# Altium PCB SL-DPT100.PcbDoc (part 1 of 3)
Units mm, origin at the board's own origin, x right, y up, seen from the top; angles counter-clockwise.
Board outline 82 x 97 mm, 4 copper layers (Top Layer, VCC, GND, Bottom Layer); 177 components, 169 nets, 599 pads, 430 vias.
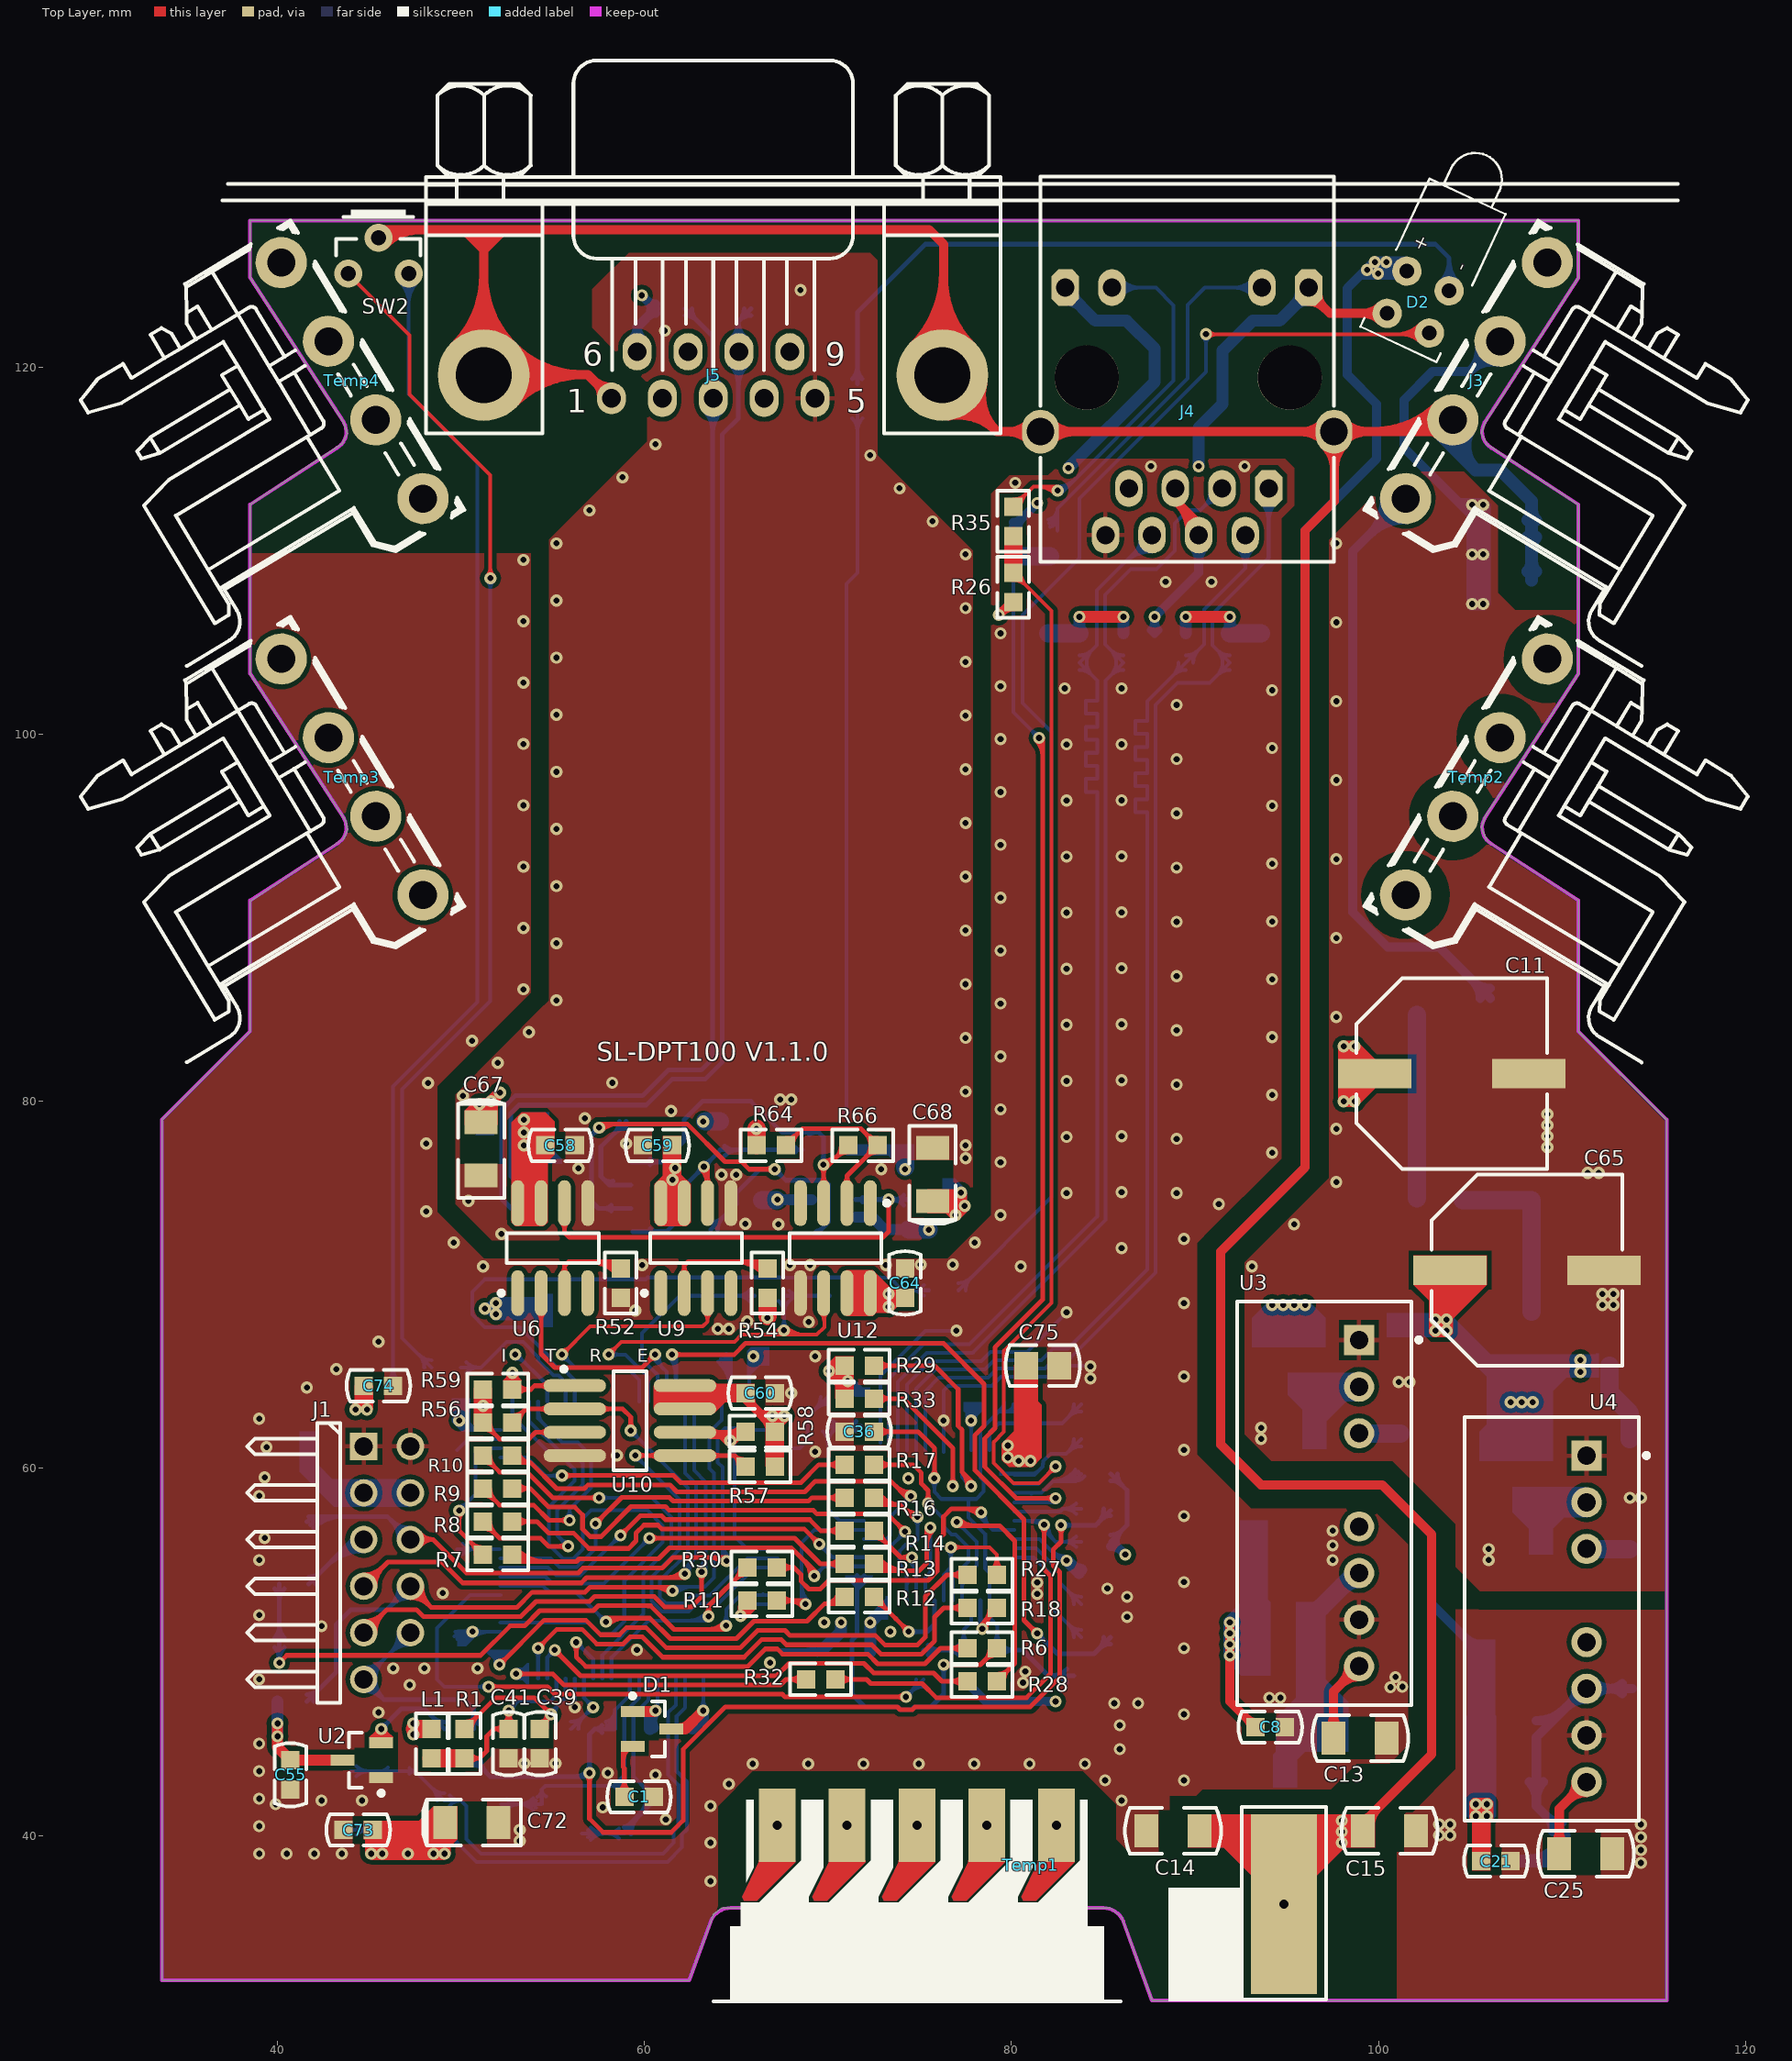
[diagram p0: Top Layer view]
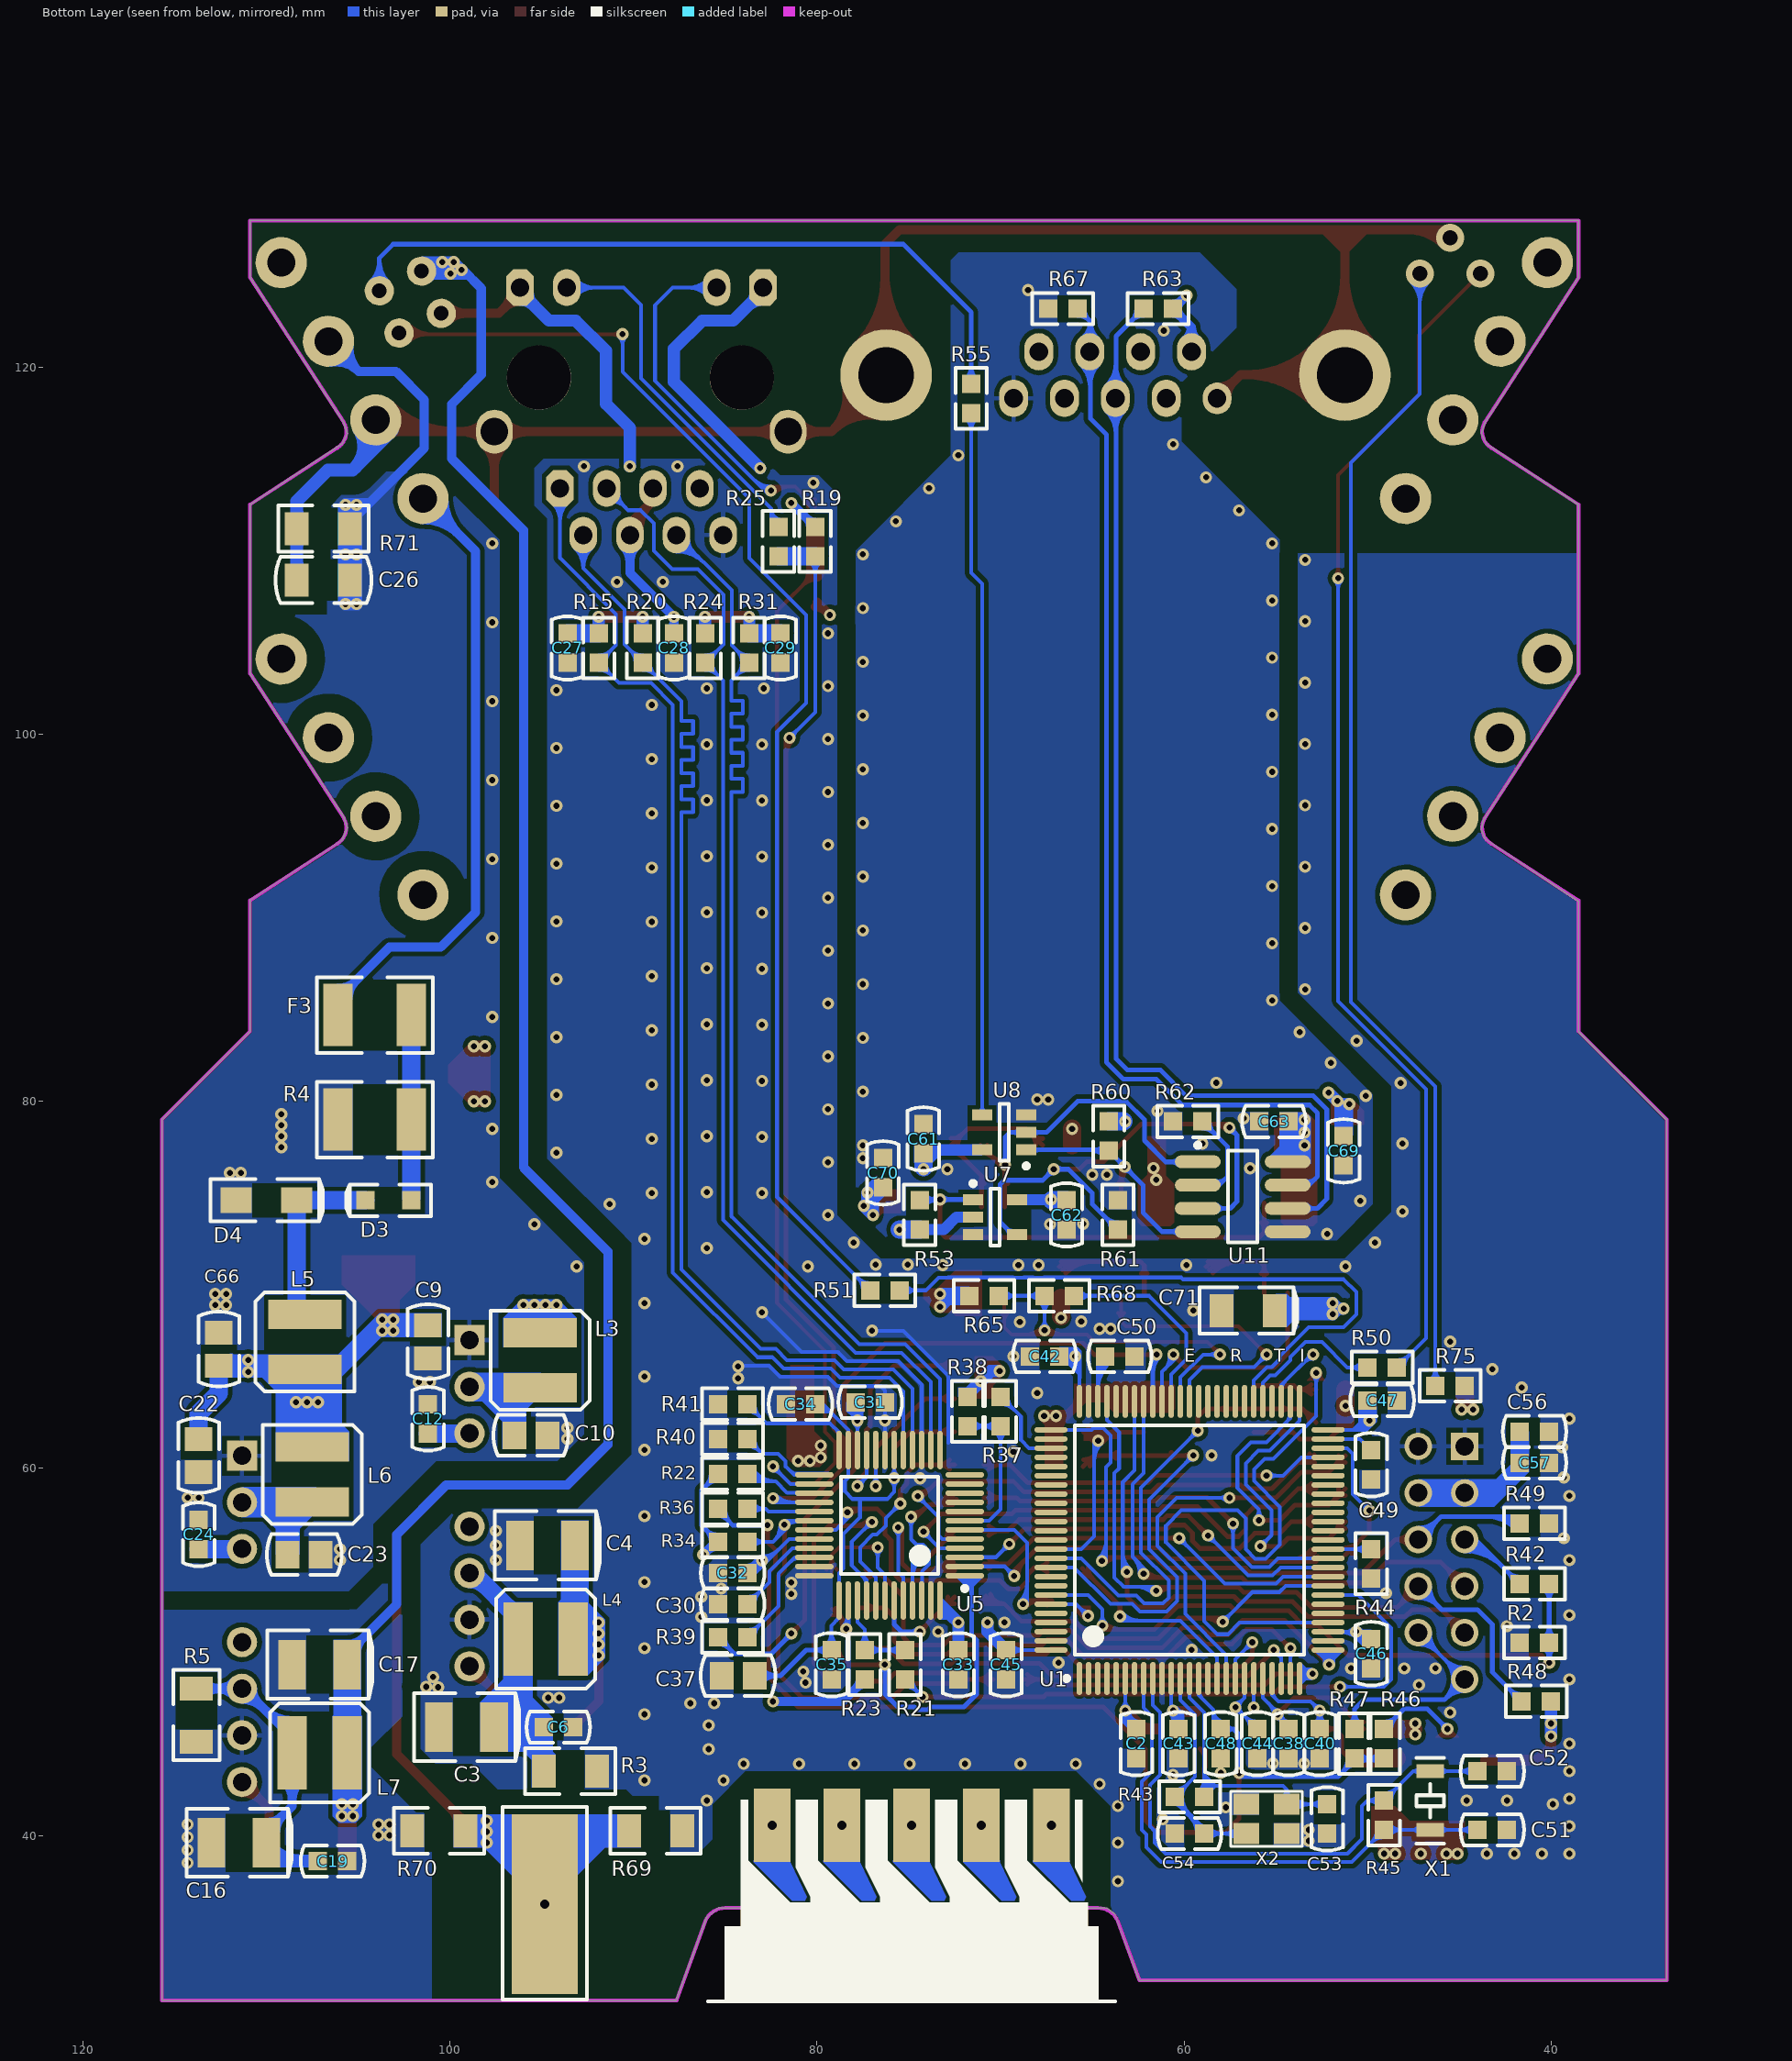
[diagram p1: Bottom Layer view, seen from below]
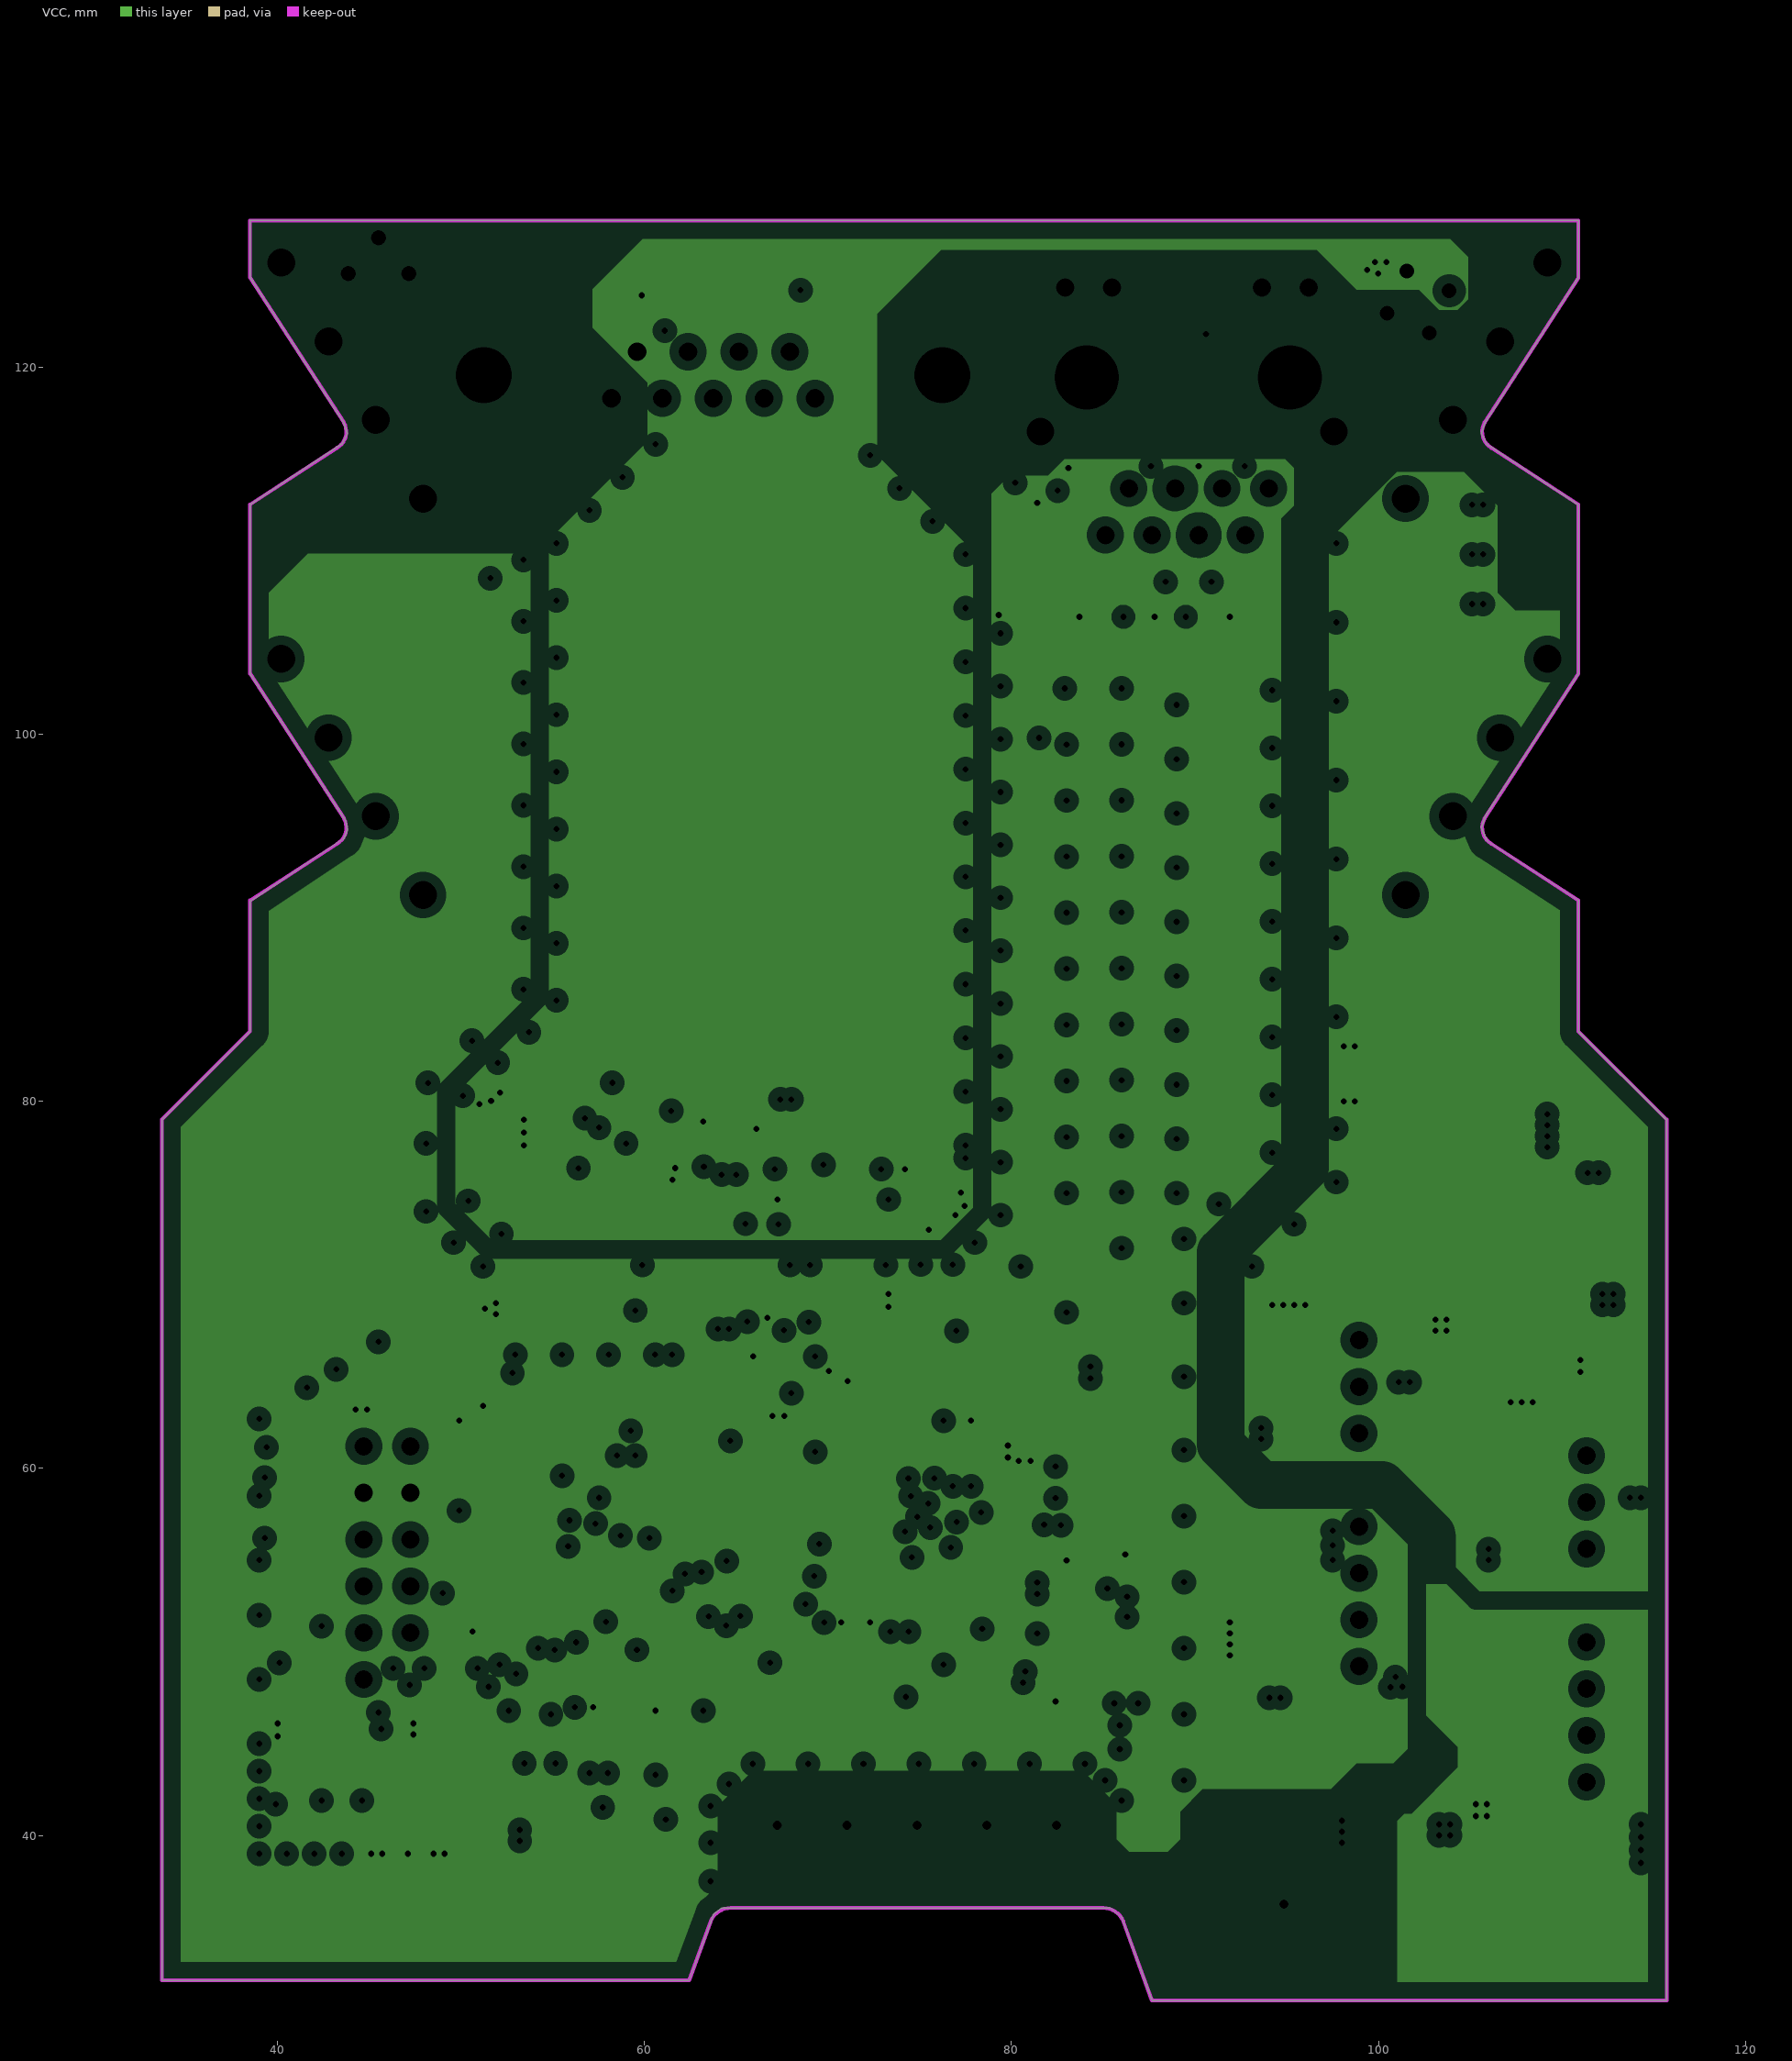
[diagram p2: VCC, clearances drawn from the general rule]
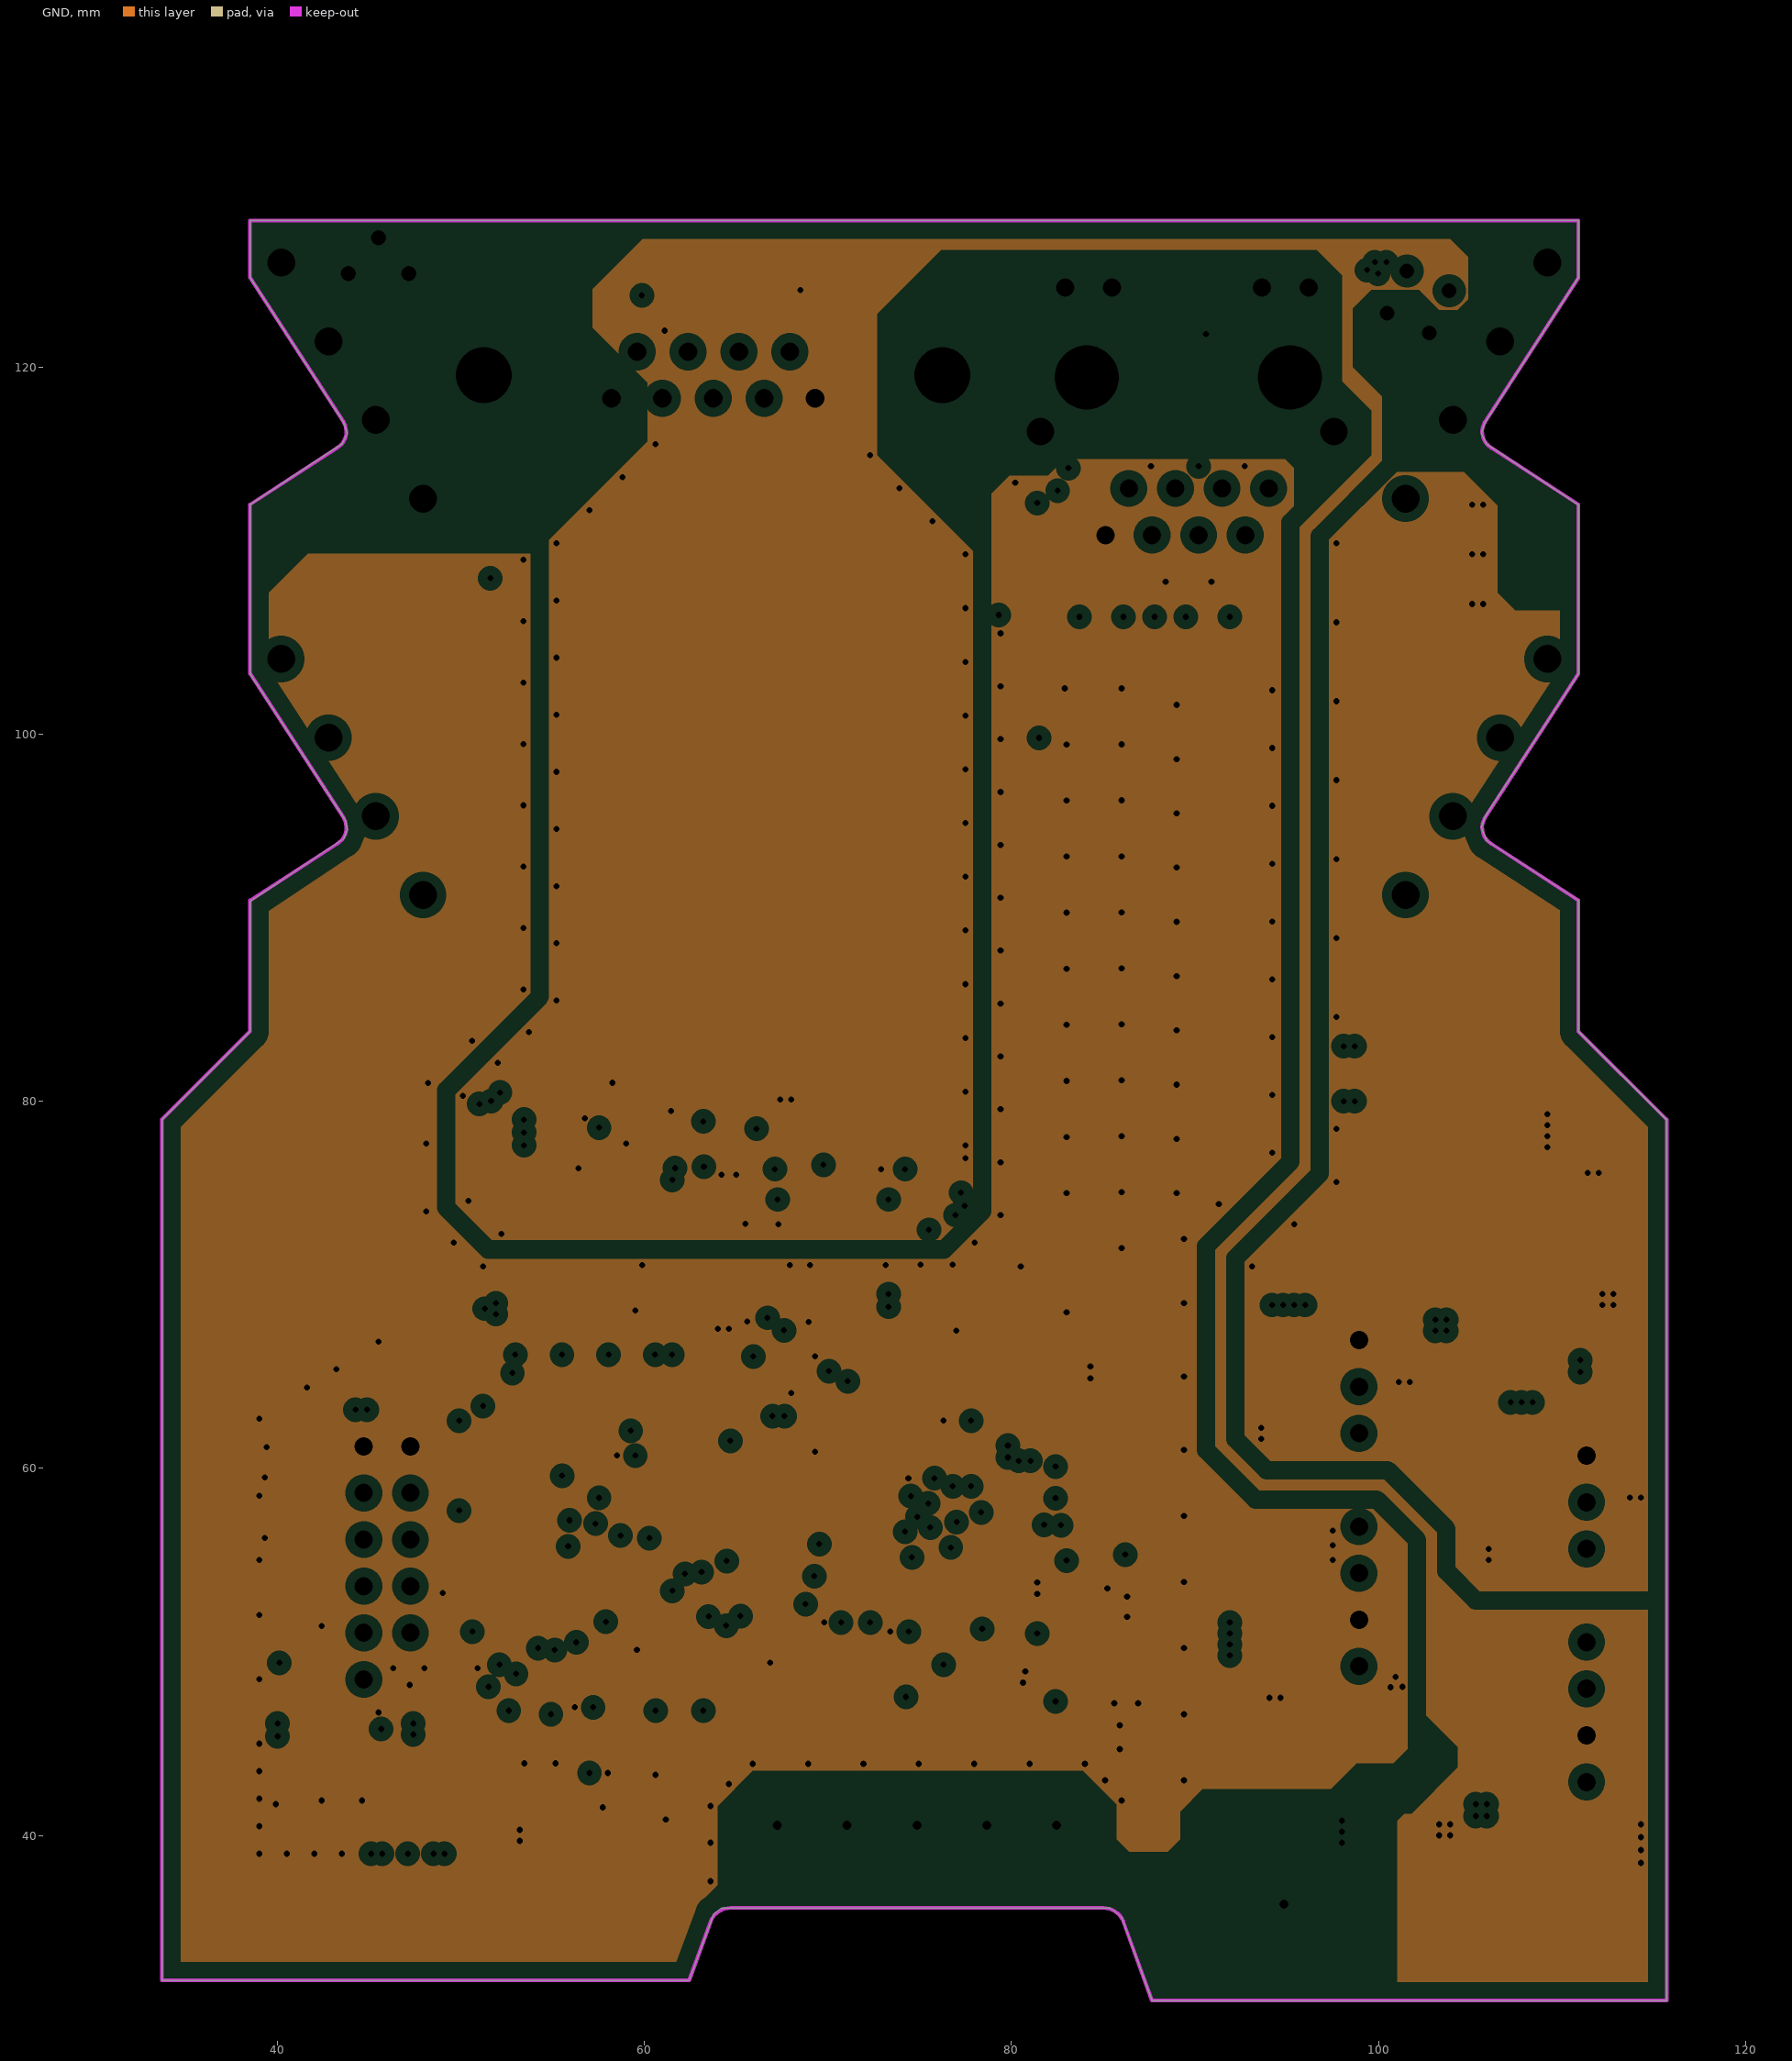
[diagram p3: GND, clearances drawn from the general rule]

## Layer stack, top to bottom
Top Layer: signal copper 0.0356
Dielectric: core 0.32, FR-4, Dk 4.8
VCC: plane copper 0.0356, net (Multiple Nets)
Dielectric: prepreg 0.32, FR-4, Dk 4.8
GND: plane copper 0.0356, net (Multiple Nets)
Dielectric: core 0.32, FR-4, Dk 4.8
Bottom Layer: signal copper 0.0356

## Board outline
64.213,36.05 63.777,35.715 62.434,32.1 33.7,32.1 33.7,79 38.5,83.8 38.5,90.9 43.6,94.3 43.8,94.8 43.7,95.3 38.5,103.3 38.5,112.5 43.5,115.8 43.8,116.4 43.6,117 38.5,124.9 38.5,128 110.9,128 110.9,124.9 105.8,117 105.6,116.4 105.9,115.8 110.9,112.5 110.9,103.3 105.8,95.5 105.6,94.9 105.9,94.2 110.9,90.956 110.9,83.8 115.7,79 115.7,31 87.669,31 86,35.55 85.375,36.05

## Design rules (kind name [scope] priority, off if disabled: settings)
Clearance Clearance_1 [InNet('V3.3') vs InNet('NetD5_2')] p1: gap=0.254
Clearance Clearance_KeepOut_L [All vs OnLayer('Keep-Out Layer')] p2: gap=0.01
Clearance Clearance_V5.0 [InNetClass('NetClass V5.0') vs Not(InNetClass('NetClass V5.0') Or InComponent(D2) Or InNet(NetD2_2) Or InNet(NetD5_2))] p3: gap=1
Clearance Clearance_V24 [InNetClass('NetClass V24') vs Not(InNetClass('NetClass V24'))] p4: gap=1
Clearance Clearance_GNDE [InNetClass('NetClass GNDE') vs Not(InNetClass('NetClass GNDE'))] p5: gap=1
Clearance Clearance_U1_U5 [(InComponent(U1) Or InComponent(U5)) And IsComponentPad] p6: gap=0.2
Clearance [All] p7: gap=0.25
DiffPairsRouting [All] p1: maxlimit=0.254 minlimit=0.254 mostfreqgap=0.254 maxuncoupledlength=12.7
HoleSize [All] p1: absolutevalues=TRUE maxlimit=25.4 minlimit=0.025 maxpercent=80.000 minpercent=20.000
PlaneClearance PlaneClearance_GNDE [InNetClass('NetClass GNDE')] p1: clearance=1
PlaneClearance [All] p2: clearance=0.508
PlaneConnect PlaneConnect_Via [IsVia] p1: planeconnectstyle=Direct reliefexpansion=0.508 reliefentries=4 reliefconductorwidth=0.254 reliefairgap=0.254
PlaneConnect [All] p2: planeconnectstyle=Relief reliefexpansion=0.508 reliefentries=4 reliefconductorwidth=0.254 reliefairgap=0.254
PolygonConnect PolygonConnect_1 [IsPad And OnMultiLayer] p1: connectstyle=Relief reliefconductorwidth=0.254 reliefentries=4 polygonreliefangle="90 Angle"
PolygonConnect [All] p2: connectstyle=Direct reliefconductorwidth=0.254 reliefentries=4 polygonreliefangle="90 Angle"
RoutingVias [All] p1: holewidth=0.33 width=0.66 viastyle="Through Hole" minholewidth=0.305 minwidth=0.61 maxholewidth=3.048 maxwidth=6.096
SilkToSilkClearance [All] p1: silktosilkclearance=0.102
SilkscreenOverComponentPads SilkscreenOverComponentPads_1 [All] p1: minsilkscreentomaskgap=0.01
SilkscreenOverComponentPads [All] p2: minsilkscreentomaskgap=0.254
SolderMaskExpansion [All] p1: expansion=0.102
Width Width_Power [InNetClass('NetClass Power')] p1 off: maxlimit=2 minlimit=0.5 preferedwidth=0.5
Width [All] p2: maxlimit=2.54 minlimit=0.203 preferedwidth=0.254
22 further rules are at their usual default settings.

## Classes and differential pairs
component class Ethernet: C27 C28 C29 C30 C31 C32 C33 C34 C35 C36 C37 J4 R6 R7 R8 R9 R10 R11 R12 R13 R14 R15 R16 R17 R18 R19 R20 R21 R22 R23 R24 R25 R26 R27 R28 R29 R30 R31 R32 R33 R34 R35 R36 R37 R38 R39 R40 R41 U5
component class MCU_1: C58 C59 C60 C61 C62 C63 C64 D2 J2 J5 R50 R51 R52 R53 R54 R55 R56 R57 R58 R59 R60 R61 R62 R63 R64 R65 R66 R67 R68 R75 SW2 U1 U6 U7 U8 U9 U10 U11 U12
component class MCU: C1 C2 C38 C39 C40 C41 C42 C43 C44 C45 C46 C47 C48 C49 C50 C51 C52 C53 C54 C55 C56 C57 D1 J1 L1 R1 R2 R42 R43 R44 R45 R46 R47 R48 R49 U2 X1 X2
component class Power: C3 C4 C5 C6 C7 C8 C9 C10 C11 C12 C13 C14 C15 C16 C17 C18 C19 C20 C21 C22 C23 C24 C25 C26 C65 C66 C67 C68 C69 C70 C71 C72 C73 C74 C75 D3 D4 F3 J3 L3 L4 L5 L6 L7 R3 R4 R5 R69 R70 R71 U3 U4
net class PA[0..15]: PA0 PA1 PA2 PA3 PA4 PA5 PA6 PA7 PA8 PA9 PA10 PA11 PA12 PA13 PA14 PA15
net class PB[0..15]: PB0 PB1 PB2 PB3 PB4 PB5 PB6 PB7 PB8 PB9 PB10 PB11 PB12 PB13 PB14 PB15
net class PC[0..15]: PC0 PC1 PC2 PC3 PC4 PC5 PC6 PC7 PC8 PC9 PC10 PC11 PC12 PC13 PC14 PC15
net class PD[0..15]: PD0 PD1 PD2 PD3 PD4 PD5 PD6 PD7 PD8 PD9 PD10 PD11 PD12 PD13 PD14 PD15
net class PE[0..15]: PE0 PE1 PE2 PE3 PE4 PE5 PE6 PE7 PE8 PE9 PE10 PE11 PE12 PE13 PE14 PE15
net class "NetClass V24": NetC12_1 NetC24_1 V24+ V24+1 V24+2 V24+3 V24+4 V24+5 V24-
net class "NetClass GNDE": GNDE
net class "NetClass V5.0": 5T1 5T2 5T3 5T4 5T5 5T6 5T7 DE DE# DP-A DP-B GNDD NetC25_1 NetD5_2 NetR55_1 NetR64_1 RE# RXD TXD V5.0 V5.0_1
net class "NetClass Power": GND GNDD GNDE V3.3 V3.3_1 V5.0 V5.0_1 V24+ V24+1 V24+2 V24+3 V24+4 V24+5 V24-
differential pair ETH_TD: +ETH_TD+ -ETH_TD-
differential pair ETH_RD: +ETH_RD+ -ETH_RD-

## Components (designator, comment, footprint, x,y, rotation, side; value= is the part's Value field where it differs from the comment)
C1 "0.1uF" C1608(0603) 59.7,42.1 r180 top
C2 "0.1uF" C1608(0603) 62.6,45 r90 bottom
C3 "33uF" C3528(B) 99.1,45.9 r180 bottom
C4 "33uF" C3528(B) 94.7,55.8 r180 bottom
C6 "0.1uF" C1608(0603) 94.1,45.9 r180 bottom
C8 "0.1uF" C1608(0603) 94.1,45.9 r0 top
C9 "4.7uF/50V" C2012(0805) 101.2,66.9 r270 bottom
C10 "4.7uF/50V" C2012(0805) 95.6,61.8 r180 bottom
C11 "220uF/50V" CAPMP10X120 104,81.5 r0 top
C12 "0.1uF" C1608(0603) 101.2,62.7 r270 bottom
C13 "10uF/50V" C3216(1206) 99,45.3 r0 top
C14 "1000pF/2KV" C3216(1206) 88.8,40.25 r0 top
C15 "1000pF/2KV" C3216(1206) 100.6,40.25 r180 top
C16 "33uF" C3528(B) 111.5,39.6 r180 bottom
C17 "33uF" C3528(B) 107.1,49.3 r180 bottom
C19 "0.1uF" C1608(0603) 106.4,38.6 r180 bottom
C21 "0.1uF" C1608(0603) 106.4,38.6 r0 top
C22 "4.7uF/50V" C2012(0805) 113.7,60.7 r270 bottom
C23 "4.7uF/50V" C2012(0805) 107.95,55.3 r180 bottom
C24 "0.1uF" C1608(0603) 113.7,56.4 r270 bottom
C25 "10uF/50V" C3216(1206) 111.3,39 r0 top
C26 "1000pF/2KV" C3216(1206) 106.9,108.4 r0 bottom
C27 "0.1uF" C1608(0603) 93.6,104.7 r90 bottom
C28 "0.1uF" C1608(0603) 87.8,104.7 r90 bottom
C29 "0.1uF" C1608(0603) 82,104.7 r90 bottom
C30 "22pF" C1608(0603) 84.6,52.6 r0 bottom
C31 "0.1uF" C1608(0603) 77.1,63.6 r180 bottom
C32 "0.1uF" C1608(0603) 84.6,54.3 r0 bottom
C33 "0.1uF" C1608(0603) 72.3,49.3 r270 bottom
C34 "0.1uF" C1608(0603) 80.9,63.5 r0 bottom
C35 "0.1uF" C1608(0603) 79.2,49.3 r270 bottom
C36 "0.1uF" C1608(0603) 71.7,62 r180 top
C37 "10uF" C2012(0805) 84.3,48.7 r180 bottom
C38 "0.1uF" C1608(0603) 54.3,45 r90 bottom
C39 "2.2uF" C1608(0603) 54.3,45 r90 top
C40 "0.1uF" C1608(0603) 52.6,45 r90 bottom
C41 "2.2uF" C1608(0603) 52.6,45 r90 top
C42 "0.1uF" C1608(0603) 67.6,66.1 r180 bottom
C43 "0.1uF" C1608(0603) 60.3,45 r90 bottom
C44 "0.1uF" C1608(0603) 56,45 r90 bottom
C45 "0.1uF" C1608(0603) 69.7,49.3 r90 bottom
C46 "0.1uF" C1608(0603) 49.8,49.902 r90 bottom
C47 "0.1uF" C1608(0603) 49.2,63.7 r0 bottom
C48 "0.1uF" C1608(0603) 58,45 r90 bottom
C49 "2.2uF" C1608(0603) 49.8,60.2 r90 bottom
C50 "2.2uF" C1608(0603) 63.502,66.1 r0 bottom
C51 "22pF" C1608(0603) 43.2,40.3 r180 bottom
C52 "22pF" C1608(0603) 43.2,43.5 r180 bottom
C53 "22pF" C1608(0603) 52.2,40.9 r270 bottom
C54 "22pF" C1608(0603) 59.7,40.1 r0 bottom
C55 "0.1uF" C1608(0603) 40.7,43.3 r90 top
C56 "2.2uF" C1608(0603) 40.9,62 r0 bottom
C57 "0.1uF" C1608(0603) 40.9,60.3 r180 bottom
C58 "0.1uF" C1608(0603) 55.4,77.6 r180 top
C59 "0.1uF" C1608(0603) 60.7,77.6 r0 top
C60 "0.1uF" C1608(0603) 66.3,64.1 r180 top
C61 "0.1uF" C1608(0603) 74.2,77.95 r90 bottom
C62 "0.1uF" C1608(0603) 66.4,73.81 r90 bottom
C63 "0.1uF" C1608(0603) 55.1,78.9 r180 bottom
C64 "0.1uF" C1608(0603) 74.2,70.1 r270 top
C65 "220uF/50V" CAPMP10X120 108.1,70.8 r0 top
C66 "4.7uF/50V" C2012(0805) 112.6,66.5 r90 bottom
C67 "10uF" C3216(A) 51.1,77.4 r270 top
C68 "10uF" C3216(A) 75.7,76 r90 top
C69 "0.1uF" C1608(0603) 51.3,77.3 r270 bottom
C70 "0.1uF" C1608(0603) 76.4,76.1 r90 bottom
C71 "10uF" C3216(A) 56.5,68.6 r0 bottom
C72 "10uF" C3216(A) 50.6,40.7 r0 top
C73 "0.1uF" C1608(0603) 44.4,40.3 r180 top
C74 "0.1uF" C1608(0603) 45.5,64.5 r0 top
C75 "10uF" C2012(0805) 81.7,65.6 r0 top
D1 "BAT54C" SOT23-3_N 60.4,45.8 r180 top
D2 "LED-2" LED-2 102.7,124.7 r65 top locked
D3 "1A/30V" SOD323 103.35,74.6 r0 bottom
D4 "SMF24A" SOD123 110,74.6 r180 bottom
F3 "SMD1812P050TF/30" R4532(1812) 104.1,84.7 r0 bottom
J1 "H2.54 6X2" HDR2X6H 44.7,61.2 r270 top locked
J3 "Header 4" MSTBO2.5/4-G1R 109.2,125.7 r329 top locked
J4 "HR911105A" RJ45-LED 94,113.4 r0 top locked
J5 "D Connector 9" DB9F 58.2,118.3 r0 top locked
L1 "FCM1608KF-601T03" R1608(0603) 48.4,45 r270 top
L3 "10uH/1A" L4040 95.1,65.9 r270 bottom
L4 "10uH/1A" L4040 94.8,50.7 r180 bottom
L5 "68uH/0.5A" L4040 107.9,66.9 r90 bottom
L6 "10uH/1A" L4040 107.5,59.675 r270 bottom
L7 "10uH/1A" L4040 107.1,44.5 r180 bottom
R1 "0R" R1608(0603) 50.2,45 r270 top
R2 "2.2K" R1608(0603) 40.9,50.5 r180 bottom
R3 "82R" R3216(1206) 93.45,43.5 r0 bottom
R4 "MLV1812NA030" R4532(1812) 104.1,79 r180 bottom
R5 "82R" R3216(1206) 113.825,46.55 r90 bottom
R6 "33R" R1608(0603) 78.4,50.2 r0 top
R7 "33R" R1608(0603) 52,55.3 r0 top
R8 "33R" R1608(0603) 52,57.1 r0 top
R9 "33R" R1608(0603) 52,58.9 r0 top
R10 "33R" R1608(0603) 52,60.7 r0 top
R11 "33R" R1608(0603) 66.4,52.8 r0 top
R12 "33R" R1608(0603) 71.7,53 r0 top
R13 "33R" R1608(0603) 71.7,54.8 r0 top
R14 "33R" R1608(0603) 71.7,56.6 r0 top
R15 "49.9R" R1608(0603) 91.9,104.7 r270 bottom
R16 "33R" R1608(0603) 71.7,58.4 r0 top
R17 "33R" R1608(0603) 71.7,60.2 r0 top
R18 "33R" R1608(0603) 78.4,52.4 r0 top
R19 "2.2K" R1608(0603) 80.1,110.5 r90 bottom
R20 "49.9R" R1608(0603) 89.5,104.7 r270 bottom
R21 "33R" R1608(0603) 75.2,49.3 r90 bottom
R22 "2.2K" R1608(0603) 84.6,59.7 r0 bottom
R23 "2.2K" R1608(0603) 77.4,49.3 r90 bottom
R24 "49.9R" R1608(0603) 86.1,104.7 r270 bottom
R25 "680R" R1608(0603) 82.1,110.5 r90 bottom
R26 "2.2K" R1608(0603) 80.1,108 r270 top
R27 "33R" R1608(0603) 78.4,54.2 r0 top
R28 "33R" R1608(0603) 78.4,48.4 r0 top
R29 "2.2K" R1608(0603) 71.7,65.6 r180 top
R30 "33R" R1608(0603) 66.4,54.6 r0 top
R31 "49.9R" R1608(0603) 83.7,104.7 r270 bottom
R32 "33R" R1608(0603) 69.6,48.5 r0 top
R33 "2.2K" R1608(0603) 71.7,63.8 r180 top
R34 "2.2K" R1608(0603) 84.6,56 r180 bottom
R35 "680R" R1608(0603) 80.1,111.6 r90 top
R36 "33R" R1608(0603) 84.6,57.8 r180 bottom
R37 "33R" R1608(0603) 70,63.1 r270 bottom
R38 "2.2K" R1608(0603) 71.8,63.1 r270 bottom
R39 "33R" R1608(0603) 84.6,50.8 r180 bottom
R40 "2.2K" R1608(0603) 84.6,61.6 r180 bottom
R41 "4.78K" R1608(0603) 84.6,63.5 r180 bottom
R42 "330R" R1608(0603) 40.9,53.7 r0 bottom
R43 "1M" R1608(0603) 59.7,42.1 r0 bottom
R44 "680R" R1608(0603) 49.8,54.8 r270 bottom
R45 "1M" R1608(0603) 49.1,41.1 r90 bottom
R46 "680R" R1608(0603) 49.1,45 r270 bottom
R47 "33R" R1608(0603) 50.7,45 r90 bottom
R48 "100K" R1608(0603) 40.8,47.3 r180 bottom
R49 "100K" R1608(0603) 40.9,57 r180 bottom
R50 "330R" R1608(0603) 49.2,65.5 r0 bottom
R51 "330R" R1608(0603) 76.3,69.7 r180 bottom
R52 "680R" R1608(0603) 58.7,70.1 r270 top
R53 "680R" R1608(0603) 74.4,73.81 r90 bottom
R54 "680R" R1608(0603) 66.7,70.1 r270 top
R55 "330R" R1608(0603) 71.6,118.3 r270 bottom
R56 "100K" R1608(0603) 52,62.5 r0 top
R57 "100K" R1608(0603) 66.3,60.1 r180 top
R58 "100K" R1608(0603) 66.3,62 r180 top
R59 "100K" R1608(0603) 52,64.3 r0 top
R60 "680R" R1608(0603) 63.6,73.81 r90 bottom
R61 "680R" R1608(0603) 64.1,78.1 r270 bottom
R62 "680R" R1608(0603) 59.8,78.9 r180 bottom
R63 "100K" R1608(0603) 61.405,123.19 r0 bottom
R64 "330R" R1608(0603) 66.9,77.6 r0 top
R65 "680R" R1608(0603) 70.9,69.4 r180 bottom
R66 "680R" R1608(0603) 71.9,77.6 r180 top
R67 "100K" R1608(0603) 66.605,123.19 r0 bottom
R68 "0R" R1608(0603) 66.8,69.4 r180 bottom
R69 "1M" R3216(1206) 88.8,40.25 r180 bottom
R70 "1M" R3216(1206) 100.6,40.25 r0 bottom
R71 "1M" R3216(1206) 106.9,111.2 r180 bottom
R75 "330R" R1608(0603) 45.5,64.5 r0 bottom
SW2 "SW-PB" "KEY 4.5X4.5X4.3MM" 45.5,125.1 r0 top locked
Temp1 "Comment" "ME22.5 TBUS1.5/5" 74.85,36.05 r0 top locked
Temp2 "Comment" MSTBO2.5/4-G1R 109.2,104.1 r329 top locked
Temp3 "Comment" MSTBO2.5/4-G1L 40.202,104.101 r31 top locked
Temp4 "Comment" MSTBO2.5/4-G1L 40.202,125.701 r31 top locked
U1 "STM32F407VGT6" TQFP100_N 59.7,56.1 r90 bottom locked
U2 "MAX809TEUR" SOT23-3_N 44.6,44.1 r0 top
U3 "WRB2403S-3WR2" SIP8 96.4,58.1 r270 top
U4 "WRB2405S-3WR2" SIP8 108.8,51.8 r270 top
U5 "DP83848IVV" LQFP48_M 76.05,56.9 r0 bottom locked
U6 "HCPL-060L" SO8_M 55,72 r90 top
U7 "SN74LVC1G132" SOT23-5_N 70.3,73.697 r180 bottom
U8 "SN74LVC1G132" SOT23-5_N 69.8,78.3 r0 bottom
U9 "HCPL-060L" SO8_M 62.8,72 r90 top
U10 "W25Q16DVSSI" SOIC8_M 59.2,62.6 r0 top locked
U11 "VP1176" SO8_M 56.8,74.8 r180 bottom
U12 "HCPL-060L" SO8_M 70.4,72 r270 top
X1 "32.768K" FC-135 46.6,41.9 r270 bottom
X2 "25MHz" XTAL-3225 55.5,40.9 r180 bottom

## Footprints (in the part's own frame and the unit in brackets; to place one, negate y for a bottom-side part, rotate by r counter-clockwise, add the part's x,y. Pads: shape width x height; smd on the part's side, far side on the other; paste and mask are expansions set on the pad)
C1608(0603) [mm] "Chip Capacitor, Body 1.6x0.8mm, IPC Medium Density"
  rect 1x1 smd: 1(0.8,0) 2(-0.8,0)
  Top Layer pour cut-out: -0.3,0.75 0.3,0.75 0.3,-0.75 -0.3,-0.75
  silkscreen extent -1.73,-0.86 1.73,0.86, body extent -0.87,-0.48 0.87,0.48, height 0.85
C2012(0805) [mm] "Chip Capacitor, Body 2.0x1.3mm, IPC Medium Density"
  rect 1.3x1.5 smd: 1(0.9,0) 2(-0.9,0)
  Top Layer pour cut-out: -0.25,-1 0.25,-1 0.25,1 -0.25,1
  silkscreen extent -2.03,-1.11 2.03,1.11, body extent -1.1,-0.72 1.1,0.72, height 1.1
C3216(1206) [mm] "Chip Capacitor, Body 3.2x1.6mm, IPC Medium Density"
  rect 1.3x1.8 smd: 1(-1.45,0) 2(1.45,0)
  Top Layer pour cut-out: -0.8,1.15 0.8,1.15 0.8,-1.15 -0.8,-1.15
  silkscreen extent -2.61,-1.26 2.61,1.26, body extent -1.7,-0.9 1.7,0.9, height 1.35
C3216(A) [mm] "Chip Capacitor, Body 3.2x1.6mm, IPC Medium Density"
  rect 1.3x1.8 smd: 1(-1.45,0) 2(1.45,0)
  Top Layer pour cut-out: -0.8,1.15 0.8,1.15 0.8,-1.15 -0.8,-1.15
  silkscreen extent -2.66,-1.26 2.66,1.26, body extent -1.7,-0.9 1.7,0.9, height 1.35
C3528(B) [mm] "Chip Capacitor, Body 3.5x2.8mm, IPC Medium Density"
  rect 1.5x2.7 smd: 1(1.5,0) 2(-1.5,0)
  Top Layer pour cut-out: 0.75,-1.6 -0.75,-1.6 -0.75,1.6 0.75,1.6
  silkscreen extent -2.86,-1.86 2.86,1.86, body extent -1.7,-1.35 1.7,1.35, height 1.35
CAPMP10X120 [mm] "Molded Capacitor, 2-Leads, Body 10mmx12mm, IPC High Density"
  rect 4x1.6 smd: 1(-4.2,0) 2(4.2,0)
  silkscreen extent -5.2,-5.2 5.2,5.2, body extent -4.98,-5 4.98,4.98, height 12.1
DB9F [mil]
  oval 62x68 hole 40: 1(0,0)
  oval 62x80 hole 40: 2(109.17,0) 3(218.33,0) 4(327.5,0) 5(436.67,0) 6(55,100) 7(164.17,100) 8(273.33,100) 9(382.5,100)
  round 196.67 hole 120: 10(-274.17,50) 11(710,50)
  silkscreen extent -398,-75 835,725
FC-135 [mm]
  rect 0.75x1.5 smd: 1(-1.6,0.011) 2(1.6,0.011)
  Top Layer pour cut-out: -1.22,1.01 -1.22,-0.99 1.23,-0.99 1.23,1.01
  silkscreen extent -2.33,-0.74 2.35,0.76
HDR2X6H [mm] "Connector; Header; 6x2 Position; Right Angle"
  rect 1.5x1.5 hole 1: 1(0,0)
  round 1.5 hole 1: 2(0,2.54) 3(2.54,0) 4(2.54,2.54) 5(5.08,0) 6(5.08,2.54) 7(7.62,0) 8(7.62,2.54) 9(10.16,0) 10(10.16,2.54) 11(12.7,0)
  silkscreen extent -1.27,-6.35 13.97,-1.27
"KEY 4.5X4.5X4.3MM" [mil]
  round 60 hole 32: 1(-64.96,0) 2(64.96,0) 3(0,76.77)
  silkscreen extent -91,39 91,138
L4040 [mm] "Chip Inductor, Body 4.0x4.0mm, IPC Medium Density"
  rect 1.6x4 smd: 1(-1.5,0) 2(1.5,0)
  Top Layer pour cut-out: -0.7,2.25 0.7,2.25 0.7,-2.25 -0.7,-2.25
  silkscreen extent -2.7,-2.7 2.7,2.7, body extent -2,-2 2,2, height 0.71
LED-2 [mm]
  round 1.6 hole 0.8: 1(0,1.27) 2(0,-1.27) 3(-2.54,1.27) 4(-2.54,-1.27)
  silkscreen extent -3.81,-2.29 7.55,2.29
LQFP48_M [mm] "48-Pin Thin Quad Flat Pack 0.5 mm Pitch, IPC Low Density"
  oval 2.1x0.3 smd: 1(-4.1,2.75) 2(-4.1,2.25) 3(-4.1,1.75) 4(-4.1,1.25) 5(-4.1,0.75) 6(-4.1,0.25) 7(-4.1,-0.25) 8(-4.1,-0.75) 9(-4.1,-1.25) 10(-4.1,-1.75) 11(-4.1,-2.25) 12(-4.1,-2.75) 25(4.1,-2.75) 26(4.1,-2.25) 27(4.1,-1.75) 28(4.1,-1.25) 29(4.1,-0.75) 30(4.1,-0.25) 31(4.1,0.25) 32(4.1,0.75) 33(4.1,1.25) 34(4.1,1.75) 35(4.1,2.25) 36(4.1,2.75)
  oval 0.3x2.1 smd: 13(-2.75,-4.1) 14(-2.25,-4.1) 15(-1.75,-4.1) 16(-1.25,-4.1) 17(-0.75,-4.1) 18(-0.25,-4.1) 19(0.25,-4.1) 20(0.75,-4.1) 21(1.25,-4.1) 22(1.75,-4.1) 23(2.25,-4.1) 24(2.75,-4.1) 37(2.75,4.1) 38(2.25,4.1) 39(1.75,4.1) 40(1.25,4.1) 41(0.75,4.1) 42(0.25,4.1) 43(-0.25,4.1) 44(-0.75,4.1) 45(-1.25,4.1) 46(-1.75,4.1) 47(-2.25,4.1) 48(-2.75,4.1)
  silkscreen extent -4.22,-2.65 2.65,3.57, body extent -3.5,-3.5 3.5,3.5, height 1.6
"ME22.5 TBUS1.5/5" [mm]
  rect 2x4 hole 0.5: 1(-7.62,4.5) 2(-3.81,4.5) 3(0,4.5) 4(3.8,4.5) 5(7.6,4.5)
  rect 3.6x9.8 hole 0.5: 6(20,0.2)
  Top Layer region: -6.62,2.6 -6.62,2.5 -8.72,0.4 -9.42,0.4 -9.52,0.6 -8.62,2.5 -8.62,2.6
  Top Layer region: -2.81,2.6 -2.81,2.5 -4.91,0.4 -5.61,0.4 -5.71,0.6 -4.81,2.5 -4.81,2.6
  Top Layer region: 8.6,2.6 8.6,2.5 6.5,0.4 5.8,0.4 5.7,0.6 6.6,2.5 6.6,2.6
  Top Layer region: 4.8,2.6 4.8,2.5 2.7,0.4 2,0.4 1.9,0.6 2.8,2.5 2.8,2.6
  Top Layer region: 1,2.6 1,2.5 -1.1,0.4 -1.8,0.4 -1.9,0.6 -1,2.5 -1,2.6
  Bottom Layer region: -6.62,2.6 -6.62,2.5 -8.72,0.4 -9.42,0.4 -9.52,0.6 -8.62,2.5 -8.62,2.6
  Bottom Layer region: -2.81,2.6 -2.81,2.5 -4.91,0.4 -5.61,0.4 -5.71,0.6 -4.81,2.5 -4.81,2.6
  Bottom Layer region: 8.6,2.6 8.6,2.5 6.5,0.4 5.8,0.4 5.7,0.6 6.6,2.5 6.6,2.6
  Bottom Layer region: 4.8,2.6 4.8,2.5 2.7,0.4 2,0.4 1.9,0.6 2.8,2.5 2.8,2.6
  Bottom Layer region: 1,2.6 1,2.5 -1.1,0.4 -1.8,0.4 -1.9,0.6 -1,2.5 -1,2.6
  Keep-Out Layer lines w0.2: -23,-3.95 -12.419,-3.95 -11.247,-0.729 ; -11.244,-0.73 cw(c-10.14,-1.2) -10.14,0 ; -10.1,0 10.1,0 ; 10.14,0.002 cw(c10.14,-1.198) 11.244,-0.728 ; 11.242,-0.728 12.8,-5.05 23,-5.05
  silkscreen extent -11.1,-5.2 22.3,5.9
MSTBO2.5/4-G1L [mil]
  round 110 hole 60: 1(0,-196.85) 2(0,-393.7) 3(0,0) 4(0,-590.55)
  silkscreen extent -619,-657 64,67
MSTBO2.5/4-G1R [mil]
  round 110 hole 60: 1(0,-196.85) 2(0,0) 3(0,-393.7) 4(0,-590.55)
  silkscreen extent -64,-657 619,67
R1608(0603) [mm] "Chip Resistor, Body 1.6x0.8mm, IPC Medium Density"
  rect 1x1 smd: 1(0.8,0) 2(-0.8,0)
  Top Layer pour cut-out: -0.3,0.75 0.3,0.75 0.3,-0.75 -0.3,-0.75
  silkscreen extent -1.66,-0.86 1.66,0.86, body extent -0.87,-0.48 0.87,0.48, height 0.85
R3216(1206) [mm] "Chip Resistor, Body 3.2x1.6mm, IPC Medium Density"
  rect 1.3x1.8 smd: 1(1.45,0) 2(-1.45,0)
  Top Layer pour cut-out: -0.8,1.15 0.8,1.15 0.8,-1.15 -0.8,-1.15
  silkscreen extent -2.46,-1.26 2.46,1.26, body extent -1.7,-0.9 1.7,0.9, height 1.35
R4532(1812) [mm] "Chip Resistor, Body 4.5x3.2mm, IPC Medium Density"
  rect 1.6x3.4 smd: 1(2,0) 2(-2,0)
  Top Layer pour cut-out: 1.2,-1.95 -1.2,-1.95 -1.2,1.95 1.2,1.95
  silkscreen extent -3.16,-2.06 3.16,2.06, body extent -2.4,-1.7 2.4,1.7, height 0.71
RJ45-LED [mm]
  round 3.5 hole 3.5: 0(-9.9,6.035) 0(1.16,6.035)
  oct 1.5x2 hole 1: 1(0.01,-0.005) 9(2.185,10.935) 12(-11.065,10.935)
  oval 1.5x2 hole 1: 2(-1.26,-2.545) 3(-2.53,-0.005) 4(-3.8,-2.545) 5(-5.07,-0.005) 6(-6.34,-2.545) 7(-7.61,-0.005) 8(-8.88,-2.545) 10(-0.355,10.935) 11(-8.525,10.935)
  oval 2x2.4 hole 1.5: 13(3.58,3.085) 14(-12.42,3.085)
  silkscreen extent -12.42,-4.02 3.58,16.98
SIP8 [mm] "SIP; 8 Round Pins; Body 22x9.5mm; Pitch 2.54 mm"
  rect 1.65x1.65 hole 1: 1(-8.89,2.54)
  round 1.65 hole 1: 2(-6.35,2.54) 3(-3.81,2.54) 5(1.27,2.54) 6(3.81,2.54) 7(6.35,2.54) 8(8.89,2.54)
  silkscreen extent -11,-4.1 11,5.93, body extent -11,-4.1 11,5.4, height 12
SO8_M [mm] "8-Pin Small Outline Integrated Circuit 1.27 mm Pitch, IPC Low Density"
  oval 2.5x0.7 smd: 1(-2.45,1.905) 2(-2.45,0.635) 3(-2.45,-0.635) 4(-2.45,-1.905) 5(2.45,-1.905) 6(2.45,-0.635) 7(2.45,0.635) 8(2.45,1.905)
  silkscreen extent -2.57,-2.5 0.8,2.93, body extent -2,-2.5 2,2.5, height 1.75
SOD123 [mm] "SOD-123; 2 Leads; Body 2.7 x 1.6 mm, (LxW)"
  rect 1.7x1.4 smd: 1(-1.65,0) 2(1.65,0)
  Top Layer pour cut-out: -0.8,0.95 -0.8,-0.95 0.8,-0.95 0.8,0.95
  silkscreen extent -3.06,-1.15 3.06,1.15, body extent -1.85,-0.91 1.85,0.9, height 1.35
SOD323 [mm] "SOD-323; 2 Leads; Body 2.5 x 1.3 mm, (LxW)"
  rect 1x1 smd: 1(-1.25,0) 2(1.25,0)
  Top Layer pour cut-out: -0.75,0.75 -0.75,-0.75 0.75,-0.75 0.75,0.75
  silkscreen extent -2.31,-0.86 2.31,0.86, body extent -1.25,-0.75 1.25,0.75, height 1.35
SOIC8_M [mm] "SOIC, 8-Leads, Body 5.4x5.4mm (max), Pitch 1.27mm, IPC Low Density"
  oval 3.4x0.7 smd: 1(-3,1.905) 2(-3,0.635) 3(-3,-0.635) 4(-3,-1.905) 5(3,-1.905) 6(3,-0.635) 7(3,0.635) 8(3,1.905)
  silkscreen extent -3.72,-2.7 0.9,2.93, body extent -2.69,-2.69 2.69,2.69, height 2.16
SOT23-3_N [mm] "SOT23, 3-Leads, Body 2.9x1.3mm, Pitch 0.95mm, Lead Span 2.3mm, IPC Medium Density"
  rect 1.3x0.6 smd: 1(1.05,-0.95) 2(1.05,0.95) 3(-1.05,0)
  Top Layer pour cut-out: 1.95,-0.65 -0.4,-0.65 -0.4,0.65 1.95,0.65
  silkscreen extent -0.7,-1.92 1.17,1.5, body extent -0.7,-1.5 0.7,1.5, height 1.2
SOT23-5_N [mm] "SOT23, 5-Leads, Body 2.9x1.6mm, Pitch 0.95mm, Lead Span 2.8mm, IPC Medium Density"
  rect 1.1x0.6 smd: 1(-1.2,0.95) 2(-1.2,0) 3(-1.2,-0.95) 4(1.2,-0.95) 5(1.2,0.95)
  silkscreen extent -1.33,-1.55 0.25,1.95, body extent -0.9,-1.55 0.9,1.55, height 1.45
TQFP100_N [mm] "100-Pin Thin Quad Flat Pack 0.5 mm Pitch, IPC Medium Density"
  oval 1.8x0.3 smd: 1(-7.55,6) 2(-7.55,5.5) 3(-7.55,5) 4(-7.55,4.5) 5(-7.55,4) 6(-7.55,3.5) 7(-7.55,3) 8(-7.55,2.5) 9(-7.55,2) 10(-7.55,1.5) 11(-7.55,1) 12(-7.55,0.5) 13(-7.55,0) 14(-7.55,-0.5) 15(-7.55,-1) 16(-7.55,-1.5) 17(-7.55,-2) 18(-7.55,-2.5) 19(-7.55,-3) 20(-7.55,-3.5) 21(-7.55,-4) 22(-7.55,-4.5) 23(-7.55,-5) 24(-7.55,-5.5) 25(-7.55,-6) 51(7.55,-6) 52(7.55,-5.5) 53(7.55,-5) 54(7.55,-4.5) 55(7.55,-4) 56(7.55,-3.5) 57(7.55,-3) 58(7.55,-2.5) 59(7.55,-2) 60(7.55,-1.5) 61(7.55,-1) 62(7.55,-0.5) 63(7.55,0) 64(7.55,0.5) 65(7.55,1) 66(7.55,1.5) 67(7.55,2) 68(7.55,2.5) 69(7.55,3) 70(7.55,3.5) 71(7.55,4) 72(7.55,4.5) 73(7.55,5) 74(7.55,5.5) 75(7.55,6)
  oval 0.3x1.8 smd: 26(-6,-7.55) 27(-5.5,-7.55) 28(-5,-7.55) 29(-4.5,-7.55) 30(-4,-7.55) 31(-3.5,-7.55) 32(-3,-7.55) 33(-2.5,-7.55) 34(-2,-7.55) 35(-1.5,-7.55) 36(-1,-7.55) 37(-0.5,-7.55) 38(0,-7.55) 39(0.5,-7.55) 40(1,-7.55) 41(1.5,-7.55) 42(2,-7.55) 43(2.5,-7.55) 44(3,-7.55) 45(3.5,-7.55) 46(4,-7.55) 47(4.5,-7.55) 48(5,-7.55) 49(5.5,-7.55) 50(6,-7.55) 76(6,7.55) 77(5.5,7.55) 78(5,7.55) 79(4.5,7.55) 80(4,7.55) 81(3.5,7.55) 82(3,7.55) 83(2.5,7.55) 84(2,7.55) 85(1.5,7.55) 86(1,7.55) 87(0.5,7.55) 88(0,7.55) 89(-0.5,7.55) 90(-1,7.55) 91(-1.5,7.55) 92(-2,7.55) 93(-2.5,7.55) 94(-3,7.55) 95(-3.5,7.55) 96(-4,7.55) 97(-4.5,7.55) 98(-5,7.55) 99(-5.5,7.55) 100(-6,7.55)
  silkscreen extent -7.67,-6.25 6.25,6.83, body extent -7,-7 7,7, height 1.6
XTAL-3225 [mm]
  rect 1.4x1.15 smd: 1(-1.108,-0.802) 2(1.092,-0.802) 3(1.092,0.798) 4(-1.108,0.798)
  Top Layer pour cut-out: -0.41,1.62 0.39,1.62 0.39,0.22 2.04,0.22 2.04,-0.23 0.39,-0.23 0.39,-1.63 -0.41,-1.63 -0.41,-0.23 -2.06,-0.23 -2.06,0.22 -0.41,0.22
  silkscreen extent -1.96,-1.5 1.94,1.5

## Part data
C1 C2 C6 C8 C9 C10 C12 C14 C15 C19 C21 C22 C23 C24 C26 C27 C28 C29 C30 C31 C32 C33 C34 C35 C36 C38 C39 C40 C41 C42 C43 C44 C45 C46 C47 C48 C49 C50 C51 C52 C53 C54 C55 C56 C57 C58 C59 C60 C61 C62 C63 C64 C66 C69 C70 C73 C74 C75: library part CAP, "Capacitor"
C3 C4 C11 C16 C17 C65 C67 C68 C71 C72: library part "CAPACITOR POL", "CA45-?V?uF ABCD 16V10UF[A型3210]16V22UF(B型1210) 16V47UF(C型1812)"
C13 C25 C37: library part "Cap Pol2", "Polarized Capacitor (Axial)"
D2: "Typical INFRARED GaAs LED"
D3: library part Diode, "Default Diode"
D4: library part "D Zener", "Zener Diode"
F3: library part FUSE1, "Fuse"
J1: library part "Header 6X2", "Header, 6-Pin, Dual row"
J3: "Header, 4-Pin"
J5: "Receptacle Assembly, 9 Position, Right Angle"
L1 L3 L4 L5 L6 L7: library part Inductor, "Inductor"
R1 R2 R3 R5 R42 R43 R44 R45 R46 R47 R48 R49 R69 R70 R71: library part R
R4: library part "Res Varistor", "Varistor (Voltage-Sensitive Resistor)"
R6 R7 R8 R9 R10 R11 R12 R13 R14 R15 R16 R17 R18 R19 R20 R21 R22 R23 R24 R25 R26 R27 R28 R29 R30 R31 R32 R33 R34 R35 R36 R37 R38 R39 R40 R41 R50 R51 R52 R53 R54 R55 R56 R57 R58 R59 R60 R61 R62 R63 R64 R65 R66 R67 R68 R75: library part "Res Semi", "Semiconductor Resistor"
SW2: "Switch"
U1: "ARM Cortex-M4 32b MCU+FPU, 210DMIP, 1024 kB Flash, 192+4 kB RAM, Camera, 82 I/Os, 100-pin LQFP, -40 to +85癈, Tray"
U2: library part MAX6520EUR-T, "3-Terminal, 1.2V Voltage Reference"
U3 U4: library part WRA_S-1WR2
U5: library part DP83848CVV
U6 U9 U12: library part HCPL-060
U10: library part 25AA640A-I/SN, "64K SPI Bus Serial EEPROM, 8-Pin SOIC, Industrial Temperature"
U11: library part MAX485ESA, "Low-Power, Slew-Rate-Limited RS-485/RS-422 Transceiver"
X1 X2: library part CRYSTAL

## Free pads (board coordinates)
  round 0.66 hole 0.33: 1(52.96,66.2) 2(55.5,66.2) 3(58.04,66.2) 4(60.58,66.2)

## Via types
v1: diameter 0.66, hole 0.33, Top Layer to Bottom Layer, tented both sides, 430 vias

## Nets (pads, with @x,y where several pads share a name; then routed paths per layer and width w, separated by ;. In a path a pad name is that pad's centre, name@x,y a point inside that pad or via, vN(x,y) a via of type N, cw(c..) or ccw(c..) an arc to the next point about the centre after c; other vN are vias at no path point)
5T1: U12.1
5T2: U12.4
5T3: J5.2
5T4: J5.7
5T5: J5.4
5T6: J5.9
5T7: U4.5
BOOT0: R2.1 R42.2 U1.94 | length 41.9
  Top Layer w0.254: v1(40.1,49.4) 40.507,49.807 51.067,49.807 52.673,51.413 53.463,51.413 54.29,52.24 57.208,52.24 57.488,52.52 60.167,52.52 60.18,52.507 60.326,52.507 61.613,51.22 v1@64.46,51.22 ; 63.467,51.22 ccw(c63.467,52.407) v1@64.306,51.568 ; 64.08,51.22 ccw(c64.08,51.794) v1@64.486,51.388
  Bottom Layer w0.203: v1@64.288,51.586 ccw(c63.898,51.976) 64.45,51.976 ccw(c65.002,51.976) v1@64.612,51.586 ; v1@64.45,51.42 64.45,52.309 65.226,53.085 67.235,53.085 U1.94@67.25,53.1 ; 66.346,53.085 ccw(c66.346,53.254) U1.94@66.466,53.134
  Bottom Layer w0.254: R2.1@39.836,50.236 cw(c39.199,49.6) 40.1,49.6 cw(c41,49.599) R2.1@40.364,50.236 ; R2.1@39.836,50.764 ccw(c39.2,51.4) 40.1,51.4 ccw(c41,51.4) R2.1@40.364,50.764 ; R42.2@39.836,53.436 cw(c39.199,52.8) 40.1,52.8 cw(c41,52.8) R42.2@40.364,53.436 ; v1@39.956,49.544 ccw(c39.609,49.891) 40.1,49.891 ccw(c40.591,49.891) v1@40.244,49.544 ; v1(40.1,49.4) R42.2@40.1,53.7
  other v1: 64.45,51.424
BOOT_0: J1.5 R42.1 | length 11.7
  Bottom Layer w0.254: R42.1@41.7,53.7 44.12,56.12 J1.5@44.7,56.12 ; R42.1@41.7,54.073 ccw(c41.7,54.974) 42.337,54.337 ccw(c42.973,53.7) R42.1@42.073,53.7 ; 42.646,54.646 cw(c44.7,52.593) J1.5@44.7,55.497 ; 43.08,55.08 cw(c44.7,53.46) J1.5@44.7,55.751 ; 43.514,55.514 cw(c44.7,54.327) J1.5@44.7,56.005 ; 43.947,55.947 cw(c44.7,55.194) J1.5@44.7,56.259
DE: R60.2 U7.4 U11.3 | length 36.2
  Top Layer w0.254: v1@57.489,78.601 cw(c57.892,78.198) 57.892,78.768 ; v1@57.528,78.768 62.322,78.768 64.383,76.707 65.293,76.707 65.7,76.3 v1(67.1,76.3) ; v1@57.669,78.421 cw(c58.505,77.585) 58.505,78.768 ; v1@66.956,76.156 ccw(c66.609,75.809) 66.609,76.3 ccw(c66.609,76.791) v1@66.956,76.444
  Bottom Layer w0.254: v1@57.321,78.59 cw(c56.77,78.59) 57.16,78.2 cw(c57.55,77.81) v1@57.55,78.361 ; v1@57.525,78.56 57.119,78.154 57.119,74.531 57.485,74.165 U11.3@59.25,74.165 ; U11.3@58.192,74.007 ccw(c57.812,73.627) 57.812,74.165 ccw(c57.812,74.703) U11.3@58.192,74.323 ; R60.2@63.6,73 65,74.4 65,75 66.3,76.3 v1(67.1,76.3) 67.7,75.7 69.8,75.7 70.027,75.473 70.027,73.427 U7.4@69.3,72.7 ; R60.2@63.6,73.383 ccw(c63.6,74.308) 64.254,73.654 ; R60.2@63.973,73.01 cw(c64.849,73.01) 64.23,73.63 ; v1@66.956,76.156 ccw(c66.609,75.809) 66.609,76.3 ccw(c66.609,76.791) v1@66.956,76.444 ; v1@67.07,76.101 cw(c67.07,75.55) 67.46,75.94 cw(c67.85,76.33) v1@67.299,76.33 ; U7.4@69.35,72.92 ccw(c69.35,73.332) U7.4@69.641,73.041 ; U7.4@69.523,72.747 cw(c69.947,72.747) U7.4@69.647,73.047
  other v1: 57.525,78.565
DE#: R53.1 U6.6 U7.1 | length 29.3
  Top Layer w0.254: U6.6@55.477,73.392 cw(c55.097,73.012) 55.635,73.012 cw(c56.173,73.012) U6.6@55.793,73.392 ; U6.6@55.635,74.45 55.635,72.865 55.907,72.593 72.993,72.593 73.3,72.9 v1@73.3,74.6 ; v1@73.156,74.506 cw(c72.809,74.159) 73.3,74.159 cw(c73.791,74.159) v1@73.444,74.506
  Bottom Layer w0.254: U7.1@71.5,74.647 R53.1@74.353,74.647 ; U7.1@71.872,74.525 cw(c72.168,74.23) 72.168,74.647 cw(c72.168,75.065) U7.1@71.872,74.77 ; 72.803,74.647 ccw(c72.803,75.147) v1@73.156,74.794 ; 72.815,74.647 cw(c72.815,74.165) v1@73.156,74.506 ; v1@73.409,74.647 cw(c73.409,73.619) R53.1@74.136,74.346 ; v1@73.444,74.506 cw(c73.785,74.165) 73.785,74.647 ; v1@73.444,74.794 ccw(c73.797,75.147) 73.797,74.647 ; v1@73.59,74.647 ccw(c73.59,75.42) R53.1@74.136,74.874
  other v1: 73.3,74.65
DP-A: J5.3 R63.1 U11.6 | length 71.7
  Bottom Layer w0.254: U11.6@53.292,74.007 ccw(c52.912,73.627) 52.912,74.165 ccw(c52.912,74.703) U11.6@53.292,74.323 ; U11.6@54.35,74.165 52.735,74.165 52.219,74.681 52.219,79.565 52.954,80.3 59.887,80.3 61.291,81.704 63.091,81.704 63.705,82.318 63.705,121.69 R63.1@62.205,123.19 ; R63.1@62.205,122.817 cw(c62.205,121.916) 62.842,122.553 cw(c63.478,123.19) R63.1@62.578,123.19 ; J5.3@63.279,117.604 cw(c62.249,116.575) 63.705,116.575 ; J5.3@63.279,118.996 ccw(c62.249,120.025) 63.705,120.025 ; J5.3@63.458,117.784 cw(c62.863,117.188) 63.705,117.188 ; J5.3@63.458,118.816 ccw(c62.863,119.412) 63.705,119.412 ; 63.705,116.379 cw(c65.438,116.379) J5.3@64.213,117.604 ; 63.705,116.992 cw(c64.825,116.992) J5.3@64.033,117.784 ; 63.705,119.608 ccw(c64.825,119.608) J5.3@64.033,118.816 ; 63.705,120.221 ccw(c65.438,120.221) J5.3@64.213,118.996
DP-B: J5.8 R67.2 U11.7 | length 69.1
  Bottom Layer w0.254: 52.853,75.772 ccw(c53.218,76.138) U11.7@53.38,75.647 ; U11.7@54.35,75.435 53.19,75.435 52.723,75.902 52.723,77.893 52.723,78.007 52.723,78.593 52.723,78.707 52.723,79.356 53.163,79.796 60.096,79.796 61.5,81.2 63.3,81.2 64.225,82.125 64.225,116.325 65.105,117.205 65.105,122.49 ; J5.8@64.681,120.134 cw(c63.656,119.11) 65.105,119.11 ; J5.8@64.695,121.539 ccw(c63.798,122.49) 65.105,122.49 ; J5.8@64.86,120.314 cw(c64.27,119.723) 65.105,119.723 ; J5.8@64.869,121.354 ccw(c64.353,121.901) 65.105,121.901 ; 65.105,118.904 cw(c66.845,118.904) J5.8@65.615,120.134 ; 65.105,119.517 cw(c66.232,119.517) J5.8@65.435,120.314 ; 65.105,121.973 ccw(c65.854,121.973) J5.8@65.396,121.38 ; R67.2@65.432,123.19 cw(c64.531,123.19) 65.168,122.553 cw(c65.805,121.917) R67.2@65.805,122.817 ; J5.8@65.551,121.581 cw(c66.253,122.49) 65.105,122.49 ; R67.2@65.805,123.19 65.105,122.49
ETH_RD+: J4.3 R24.1 U5.14 | length 68.8
  Bottom Layer w0.203: U5.14@73.8,61 73.8,64.713 75.387,66.3 77.889,66.3 85.125,73.536 85.125,102.925 R24.1@86.1,103.9 85.1,104.9 85.1,107.6 86.493,108.993 87.893,108.993 88.9,110 88.9,111.5 89.607,112.207 90.282,112.207 J4.3@91.47,113.395 ; 85.42,103.22 ccw(c84.74,103.9) 85.702,103.9 ccw(c84.74,103.9) 85.42,104.58 ccw(c86.1,105.26) R24.1@86.1,104.298 ; 85.42,103.22 cw(c86.1,102.54) R24.1@86.1,103.502 ; 90.45,112.374 cw(c91.267,111.557) J4.3@91.414,112.703 ; 90.54,112.465 ccw(c89.86,113.145) J4.3@90.822,113.145 ; 90.742,112.667 cw(c91.333,112.076) J4.3@91.439,112.905
ETH_RD-: J4.6 R31.1 U5.13 | length 70.7
  Bottom Layer w0.203: U5.13@73.3,61 73.3,64.859 75.198,66.757 77.7,66.757 84.668,73.725 84.668,96 84.668,96.144 84.668,96.855 84.053,96.855 84.053,97.566 84.668,97.566 84.668,98.277 84.053,98.277 84.053,98.988 84.668,98.988 84.668,99.7 84.053,99.7 84.053,100.411 84.668,100.411 84.668,101.122 84.053,101.122 84.053,101.833 84.668,101.833 84.668,102.544 84.668,102.9 84.668,102.932 R31.1@83.7,103.9 84.647,104.847 84.647,107.841 J4.6@87.66,110.855 ; R31.1@83.7,103.502 cw(c83.7,102.54) 84.38,103.22 cw(c85.06,103.9) 84.098,103.9 cw(c85.06,103.9) 84.38,104.58 cw(c83.7,105.26) R31.1@83.7,104.298 ; 86.127,109.321 cw(c87.66,107.788) J4.6@87.66,109.957 ; 86.473,109.668 cw(c87.66,108.481) J4.6@87.66,110.16 ; 86.73,109.925 ccw(c86.05,110.605) J4.6@87.012,110.605 ; 86.82,110.015 cw(c87.66,109.175) J4.6@87.66,110.363
ETH_TD+: J4.1 R15.1 U5.17 | length 72.6
  Bottom Layer w0.203: U5.17@75.3,61 75.3,64.2 76.036,64.936 78.736,64.936 79.236,65.436 81.824,65.436 82.441,66.053 83.253,66.053 87.857,70.657 87.857,101.607 89.05,102.8 90.8,102.8 R15.1@91.9,103.9 ; 91.22,103.22 ccw(c90.54,103.9) 91.502,103.9 ccw(c90.54,103.9) 91.22,104.58 ccw(c91.9,105.26) R15.1@91.9,104.298 ; 91.22,103.22 cw(c91.9,102.54) R15.1@91.9,103.502 ; R15.1@91.8,104 90.957,104.843 90.957,106.557 94.01,109.61 J4.1@94.01,113.395 ; J4.1@93.552,112.686 cw(c92.445,111.58) 94.01,111.58 cw(c95.576,111.58) J4.1@94.469,112.686 ; J4.1@93.695,112.83 cw(c92.935,112.07) 94.01,112.07 cw(c95.085,112.07) J4.1@94.325,112.83
ETH_TD-: J4.2 R20.1 U5.16 | length 73.2
  Bottom Layer w0.203: U5.16@74.8,61 74.8,64.347 75.847,65.394 78.547,65.394 79.047,65.894 81.635,65.894 82.251,66.51 83.064,66.51 87.4,70.847 87.4,95.751 86.753,95.751 86.753,96.463 87.4,96.463 87.4,97.174 86.753,97.174 86.753,97.885 87.4,97.885 87.4,98.596 86.753,98.596 86.753,99.307 87.4,99.307 87.4,100.019 86.753,100.019 86.753,100.73 87.4,100.73 87.4,101.797 R20.1@89.477,103.873 ; 88.82,103.22 ccw(c88.14,103.9) R20.1@89.102,103.9 ; 88.82,103.22 cw(c89.5,102.54) R20.1@89.5,103.502 ; R20.1@89.5,103.9 90.5,104.9 90.5,106.8 92.74,109.04 J4.2@92.74,110.855 ; R20.1@89.5,104.298 ccw(c89.5,105.26) 90.18,104.58 ccw(c90.86,103.9) R20.1@89.898,103.9 ; J4.2@92.282,110.146 cw(c91.177,109.04) 92.74,109.04 cw(c94.304,109.04) J4.2@93.199,110.146 ; J4.2@92.426,110.29 cw(c91.667,109.531) 92.74,109.531 cw(c93.814,109.531) J4.2@93.055,110.29
GND: C1.2 C2.2 C3.2 C4.2 C6.1 C8.1 C13.2 C14.1 C27.2 C28.2 C29.2 C30.1 C31.1 C32.1 C33.1 C34.1 C35.1 C36.1 C37.2 C38.2 C39.2 C40.2 C41.2 C42.2 C43.2 C44.2 C45.2 C46.2 C47.2 C48.2 C49.2 C50.2 C51.1 C52.1 C53.1 C54.1 C55.2 C56.2 C57.1 C60.2 C64.2 C71.2 C72.2 C73.1 C74.1 C75.1 J1.1 J1.2 J4.8 R2.2 R3.2 R40.2 R41.2 R44.1 R49.1 R52.1 R69.1 R75.2 U1.10 U1.20 U1.27 U1.74 U1.99 U2.1 U3.7 U5.15 U5.19 U5.35 U5.36 U5.47 U10.4 U12.5 X2.2 X2.4 | length 36.5
  Bottom Layer w0.203: v1@56.2,47 U1.20@56.2,48.55 ; 72.847,61.4 72.847,65.047 75.3,67.5 v1(77,67.5) ; U5.15@74.3,61 74.3,64.572 75.575,65.847 78.359,65.847 78.859,66.347 80.847,66.347 v1(83,68.5) ; U5.19@76.3,60.89 76.3,64.23 76.553,64.483 78.924,64.483 79.424,64.983 82.012,64.983 82.628,65.6 v1@84.3,65.6 ; v1@76.8,67.5 v1@77,67.7
  other v1: 63.6,37.5 39,39 40.5,39 42,39 43.5,39 63.6,39.6 53.2,39.7 53.2,40.3 39,40.5 61.16,40.87 57.725,41.525 63.6,41.6 39.9,41.7 42.4,41.9 44.6,41.9 86,41.9 39,42 64.6,42.8 85.1,43 89.4,43 60.6,43.3 58,43.4 39,43.5 65.9,43.9 68.917,43.9 71.933,43.9 74.95,43.9 77.967,43.9 80.983,43.9 84,43.9 53.45,43.925 55.15,43.925 85.9,44.7 39,45 85.9,46 89.4,46.6 45.5,46.7 56.2,46.98 85.6,47.2 86.9,47.2 94.05,47.5 94.65,47.5 100.65,48.075 101.3,48.1 47.2,48.2 80.625,48.325 39,48.5 100.925,48.625 80.75,48.925 46.3,49.1 48,49.1 50.9,49.1 66.84,49.41 59.585,50.11 89.4,50.2 73.4,51.1 42.4,51.4 69.79,51.6 86.3,51.9 39,52 86.3,53 81.4,53.15 49,53.2 85.225,53.45 81.4,53.775 89.4,53.8 39,55 97.5,55 97.5,55.8 39.3,56.2 97.5,56.6 89.4,57.4 39,58.5 74.38,59.45 39.3,59.5 58.5,60.7 69.3,60.9 89.4,61 39.4,61.15 76.3,62.6 39,62.7 68,64.1 41.6,64.4 84.3,64.9 89.4,65 43.2,65.4 84.3,65.55 69.3,66.1 45.5,66.9 64,67.6 64.6,67.6 68.95,67.975 65.6,68 59.5,68.6 89.4,69 51.2,71 80.5,71 59.875,71.075 67.925,71.075 69.025,71.075 73.15,71.075 75.05,71.1 76.8,71.1 86,72 49.6,72.3 78,72.3 89.4,72.5 79.4,73.8 48.1,74 91.3,74.4 83,75 89,75 86,75.05 79.4,76.682 94.2,77.2 48.1,77.7 89,77.956 83,78.056 86,78.1 79.4,79.564 94.2,80.35 89,80.911 48.2,81 83,81.111 86,81.15 79.4,82.445 50.6,83.3 94.2,83.5 89,83.867 83,84.167 86,84.2 79.4,85.327 53.4,86.1 94.2,86.65 89,86.822 83,87.222 86,87.25 79.4,88.209 53.4,89.443 89,89.778 94.2,89.8 83,90.278 86,90.3 79.4,91.091 89,92.733 53.4,92.786 94.2,92.95 83,93.333 86,93.35 79.4,93.973 89,95.689 94.2,96.1 53.4,96.129 83,96.389 86,96.4 79.4,96.855 89,98.644 94.2,99.25 83,99.444 86,99.45 53.4,99.471 79.4,99.736 89,101.6 94.2,102.4 82.9,102.5 86,102.5 79.4,102.618 53.4,102.814 79.4,105.5 53.4,106.157 88.4,108.3 90.9,108.3 53.4,109.5 80.2,113.7 87.6,114.6 92.7,114.6
GNDD: C15.1 C16.2 C17.2 C19.1 C21.1 C25.2 C58.2 C59.2 C61.1 C62.2 C63.2 C67.2 C68.2 C69.1 C70.1 J5.5 R5.2 R60.1 R62.2 R67.1 R70.1 U4.7 U6.5 U7.3 U8.3 U9.5 U11.5
  other v1: 114.3,38.5 114.3,39.2 114.3,39.9 103.3,40 103.9,40 103.3,40.6 103.9,40.6 114.3,40.6 52.2,72.775 67.3,73.3 65.5,73.325 50.4,74.575 64.2,76 65,76 72.9,76.3 56.4,76.35 77.5,76.9 77.5,77.6 59,77.7 56.75,79.075 61.45,79.475 67.4,80.1 68,80.1 50.1,80.3 77.5,80.527 58.24,81.01 52,82.1 77.5,83.455 53.7,83.767 55.2,85.5 77.5,86.382 55.2,88.612 77.5,89.309 55.2,91.725 77.5,92.236 55.2,94.837 77.5,95.164 55.2,97.95 77.5,98.091 77.5,101.018 55.2,101.062 77.5,103.945 55.2,104.175 77.5,106.873 55.2,107.287 77.5,109.8 55.2,110.4 75.7,111.6 57,112.2 73.9,113.4 58.8,114 72.3,115.2 60.6,115.8 61.105,121.99 68.5,124.2
GNDE: C14.2 C15.2 C26.2 J3.3 J4.13 J4.14 J5.1 J5.10 J5.11 R69.2 R70.2 R71.2 SW2.3 Temp1.6 | length 289.5
  Top Layer w0.5: SW2.3@45.508,127.042 cw(c46.615,125.935) 46.615,127.5 ; SW2.3@45.8,127.5 75.5,127.5 76.3,126.7 J5.11@76.3,119.5 ; SW2.3@45.862,126.688 cw(c47.822,124.728) 47.822,127.5 ; J5.10@49.647,121.159 ccw(c45.81,124.996) 51.236,124.996 ccw(c56.662,124.996) 52.825,121.159 ccw(c56.59,124.924) 56.59,119.6 ; J5.10@50,120.806 ccw(c47.017,123.789) 51.236,123.789 ccw(c55.455,123.789) 52.472,120.806 ccw(c55.383,123.717) 55.383,119.6 ; J5.10@50.354,120.452 ccw(c48.224,122.582) 51.236,122.582 ccw(c54.248,122.582) 52.118,120.452 ccw(c54.176,122.51) 54.176,119.6 ; J5.10@51.2,119.6 56.9,119.6 J5.1@58.2,118.3 ; J5.10@51.236,119.57 51.236,127.2 ; J5.10@52.118,118.688 cw(c54.321,116.485) 54.321,119.6 ; J5.10@52.472,118.334 cw(c55.528,115.278) 55.528,119.6 ; J5.10@52.825,117.981 cw(c56.735,114.071) 56.735,119.6 ; 57.153,119.347 ccw(c58.2,120.395) J5.1@58.2,118.914 ; 57.336,119.164 cw(c56.549,118.376) J5.1@57.663,118.376 ; J5.11@74.645,121.159 ccw(c70.648,125.156) 76.3,125.156 ; J5.11@74.998,120.806 ccw(c71.855,123.949) 76.3,123.949 ; J5.11@75.352,120.452 ccw(c73.062,122.742) 76.3,122.742 ; J5.11@76.2,119.5 79.215,116.485 J4.13@97.6,116.485 ; 76.3,122.423 ccw(c79.087,122.423) J5.11@77.116,120.452 ; 76.3,123.63 ccw(c80.294,123.63) J5.11@77.47,120.806 ; 76.3,124.837 ccw(c81.501,124.837) J5.11@77.823,121.159 ; J5.11@76.524,117.847 cw(c76.896,115.641) 78.477,117.223 ; J5.11@76.607,117.354 cw(c77.094,114.468) 79.163,116.537 cw(c81.101,118.475) J5.11@78.427,119.077 ; J5.11@77.939,119.187 ccw(c80.053,118.711) 78.521,117.179 ; J4.14@81.05,115.955 ccw(c79.77,114.674) 79.77,116.485 ccw(c79.77,118.296) J4.14@81.05,117.015 ; J4.14@82.111,115.955 cw(c83.391,114.674) 83.391,116.485 cw(c83.391,118.296) J4.14@82.111,117.015 ; J4.13@97.05,115.755 cw(c95.722,114.427) 97.6,114.427 ; J4.13@97.05,115.955 ccw(c95.77,114.674) 95.77,116.485 ccw(c95.77,118.296) J4.13@97.05,117.015 ; 97.6,114.522 cw(c99.343,114.522) J4.13@98.111,115.755 ; J4.13@97.6,116.4 97.6,112.7 96,111.1 96,76.4 91.4,71.8 91.4,61.3 93.6,59.1 100.2,59.1 102.9,56.4 102.9,44.418 C15.2@99.15,40.668 ; J4.13@97.6,116.5 J3.3@104.05,116.5 ; J4.13@98.111,115.955 cw(c99.427,114.638) 99.427,116.5 ; J4.13@98.111,117.015 ccw(c99.354,118.259) 99.354,116.5 ; C15.2@99.15,40.9 ccw(c99.15,41.461) C15.2@99.546,41.064 ; C15.2@99.55,40.5 cw(c100.921,40.5) 99.951,41.469 ; 99.764,116.5 ccw(c99.764,121.414) J3.3@103.239,117.939 ; 100.971,116.5 ccw(c100.971,120.207) J3.3@103.592,117.586 ; 102.178,116.5 ccw(c102.178,119) J3.3@103.946,117.232 ; 102.797,116.5 cw(c102.797,115.876) J3.3@103.239,116.317
  Bottom Layer w0.7: J3.3@103.15,116.55 105.3,114.4 106.65,114.4 108.35,112.7 C26.2@108.35,108.4 ; J3.3@104.348,116.951 ccw(c105.634,116.184) 104.575,115.125 ; J3.3@104.949,116.592 ccw(c106.431,115.709) 105.211,114.489 ; C26.2@108.138,108.862 ccw(c107.626,109.374) 108.35,109.374 ccw(c109.074,109.374) C26.2@108.562,108.862 ; R71.2@108.138,110.738 cw(c107.626,110.226) 108.35,110.226 cw(c109.074,110.226) R71.2@108.562,110.738 ; R71.2@108.138,111.662 ccw(c107.626,112.174) 108.35,112.174 ccw(c109.074,112.174) R71.2@108.562,111.662
  other v1: 98,39.6 98,40.2 98,40.8
LED_ACT: R26.2 R35.2 U5.26 | length 62.6
  Top Layer w0.203: R26.2@80.1,108.402 cw(c80.1,107.44) 80.78,108.12 cw(c81.46,108.8) R26.2@80.498,108.8 ; R26.2@80.2,108.7 82.182,106.718 82.182,69.005 79.579,66.402 79.579,61.989 79.018,61.428 79.018,60.282 80.1,59.2 81.5,59.2 v1(82.4,60.1) ; v1@82.171,60.1 cw(c81.62,60.1) 82.01,59.71 cw(c82.4,59.32) v1@82.4,59.871
  Top Layer w1: R26.2@80.1,108.8 R35.2@80.1,110.8
  Bottom Layer w0.203: U5.26@80.15,59.15 81.45,59.15 v1(82.4,60.1) ; v1@82.171,60.1 cw(c81.62,60.1) 82.01,59.71 cw(c82.4,59.32) v1@82.4,59.871
LED_LINK: R19.2 R25.2 U5.28 | length 66.6
  Top Layer w0.254: v1@81.356,99.656 cw(c80.527,98.827) 81.7,98.827 ; v1@81.536,99.836 cw(c81.14,99.44) 81.7,99.44 ; v1@81.7,99.8 81.7,69.2 79.1,66.6 79.1,62.187 78.54,61.627 78.54,60.084 80.248,58.375 v1(82.4,58.375) ; v1@82.256,58.231 ccw(c81.909,57.884) 81.909,58.375 ccw(c81.909,58.866) v1@82.256,58.519
  Bottom Layer w0.203: R19.2@79.818,109.418 cw(c79.138,108.738) 80.1,108.738 cw(c81.062,108.738) R19.2@80.382,109.418 ; R19.2@80.1,109.7 80.1,101.2 v1(81.5,99.8) ; U5.28@80.15,58.15 v1@82.45,58.15 ; v1@81.271,99.8 ccw(c80.72,99.8) 81.11,100.19 ccw(c81.5,100.58) v1@81.5,100.029 ; 81.305,58.15 ccw(c81.305,59.47) v1@82.238,58.537 ; 81.795,58.15 ccw(c81.795,58.98) v1@82.382,58.393
  Bottom Layer w1: R19.2@80.1,109.7 R25.2@82.1,109.7
NetC12_1: C12.1 U3.3 | length 2.3
  Bottom Layer w1: U3.3@98.9,61.9 C12.1@101.2,61.9
NetC13_1: C13.1 U3.8 | length 8.1
  Top Layer w0.508: C13.1@97.27,45.83 ccw(c96.594,46.506) 97.55,46.506 ccw(c98.506,46.506) C13.1@97.83,45.83 ; C13.1@97.55,45.3 97.55,47.85 U3.8@98.9,49.2 ; 97.914,48.214 cw(c98.94,47.188) U3.8@98.94,48.639 ; 97.986,48.286 ccw(c97.063,49.21) U3.8@98.369,49.21
NetC24_1: C24.1 U4.3 | length 2.3
  Bottom Layer w1: U4.3@111.4,55.6 C24.1@113.7,55.6
NetC25_1: C25.1 U4.8 | length 8.2
  Top Layer w0.508: C25.1@109.57,39.53 ccw(c108.894,40.206) 109.85,40.206 ccw(c110.806,40.206) C25.1@110.13,39.53 ; C25.1@109.85,39 109.85,41.45 U4.8@111.3,42.9 ; 110.314,41.914 cw(c111.34,40.888) U4.8@111.34,42.339 ; 110.386,41.986 ccw(c109.463,42.91) U4.8@110.769,42.91
NetC30_2: C30.2 U5.33 | length 6.8
  Bottom Layer w0.203: U5.33@80.15,55.65 81.35,55.65 82.6,54.4 82.6,53.797 C30.2@83.798,52.598 ; 83.114,53.282 ccw(c83.8,53.968) C30.2@83.8,52.998 ; 83.122,53.275 cw(c82.448,52.6) C30.2@83.402,52.6